# Altium PCB Main_Block.PcbDoc (part 1 of 3)
Units mil, origin at the board's own origin, x right, y up, seen from the top; angles counter-clockwise.
Board outline 1101.34 x 1573.78 mil, 8 copper layers (Top Layer - Signal, L2 - GND, L3-Signal, Layer 3 - Signal, L5 PWR, L6-Signal, L7-GND, Bottom Layer - Signal), stack 62.48 mil thick; 156 components, 137 nets, 799 pads, 431 vias.
Unrouted connection lines stored in the file: 382.
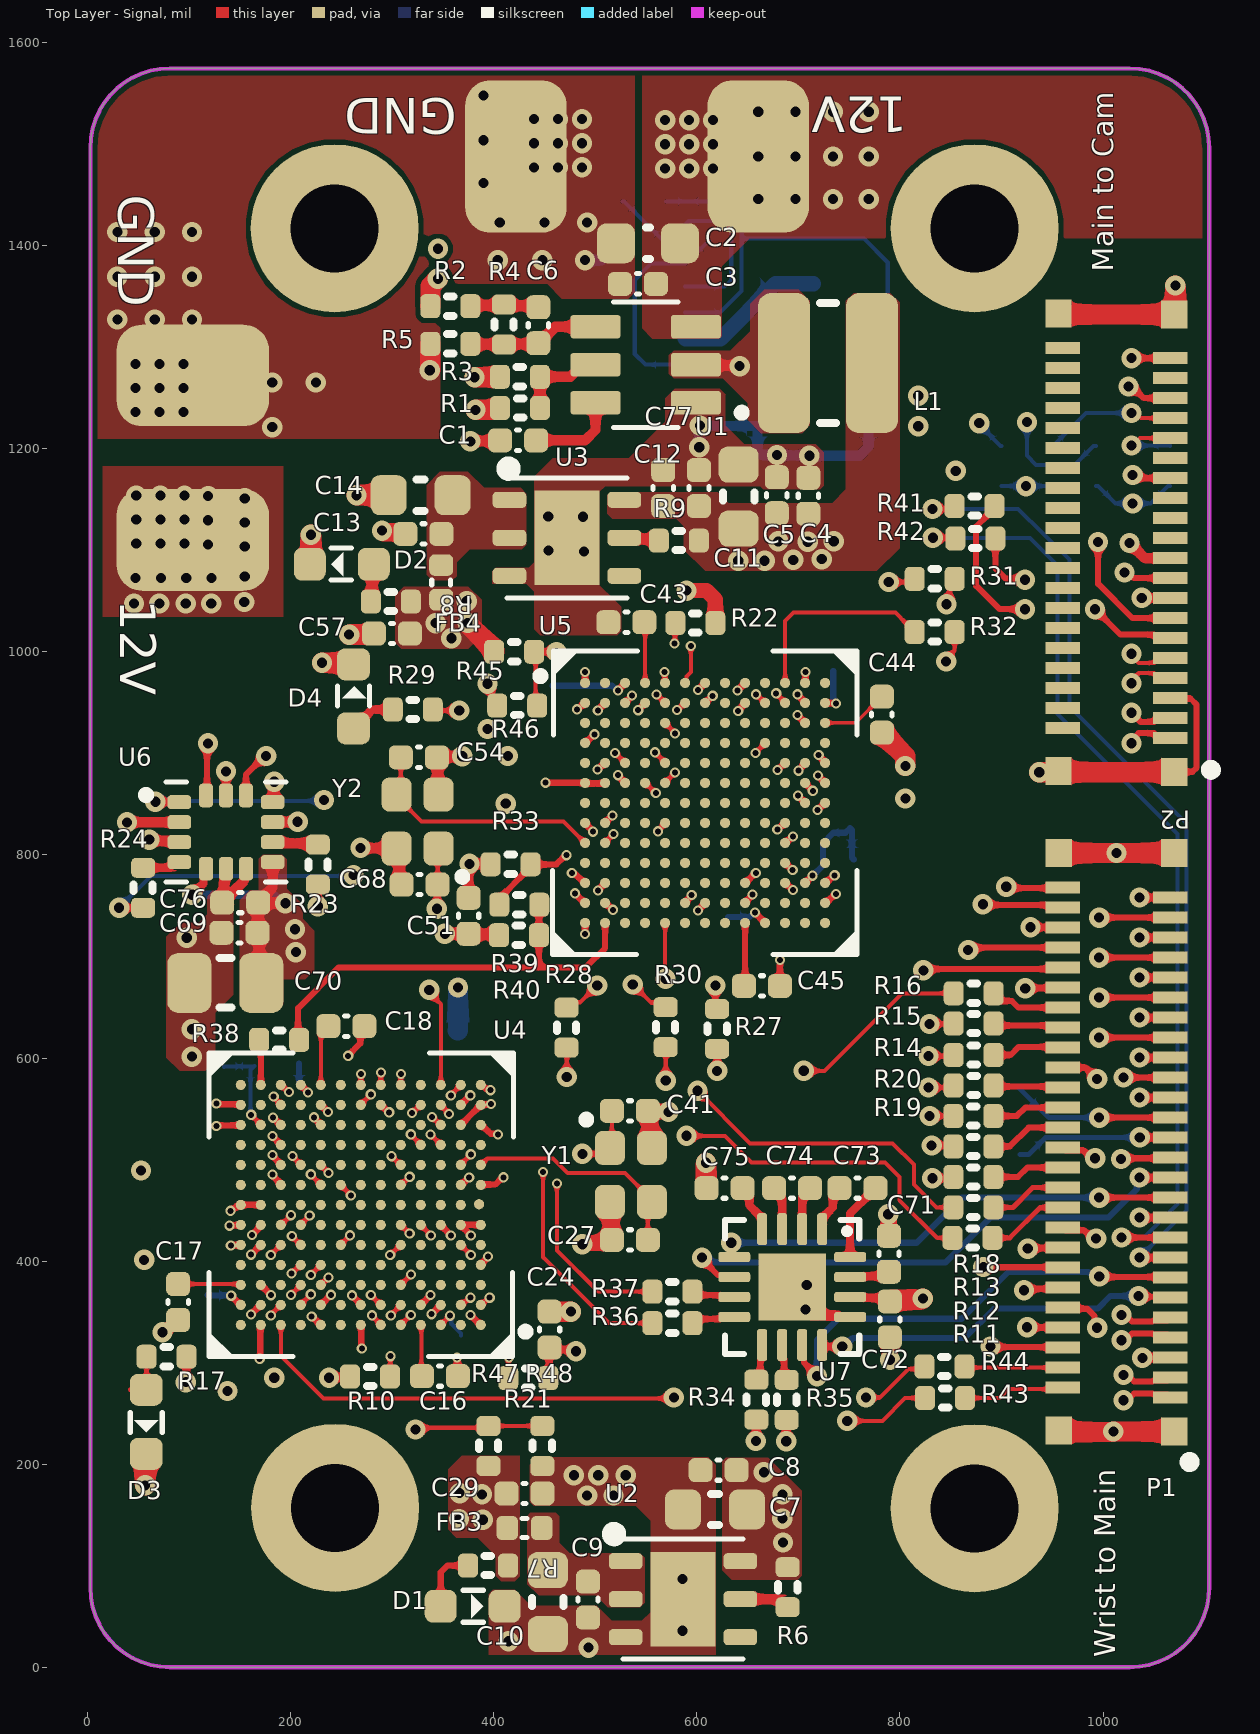
[diagram p0: Top Layer - Signal view]
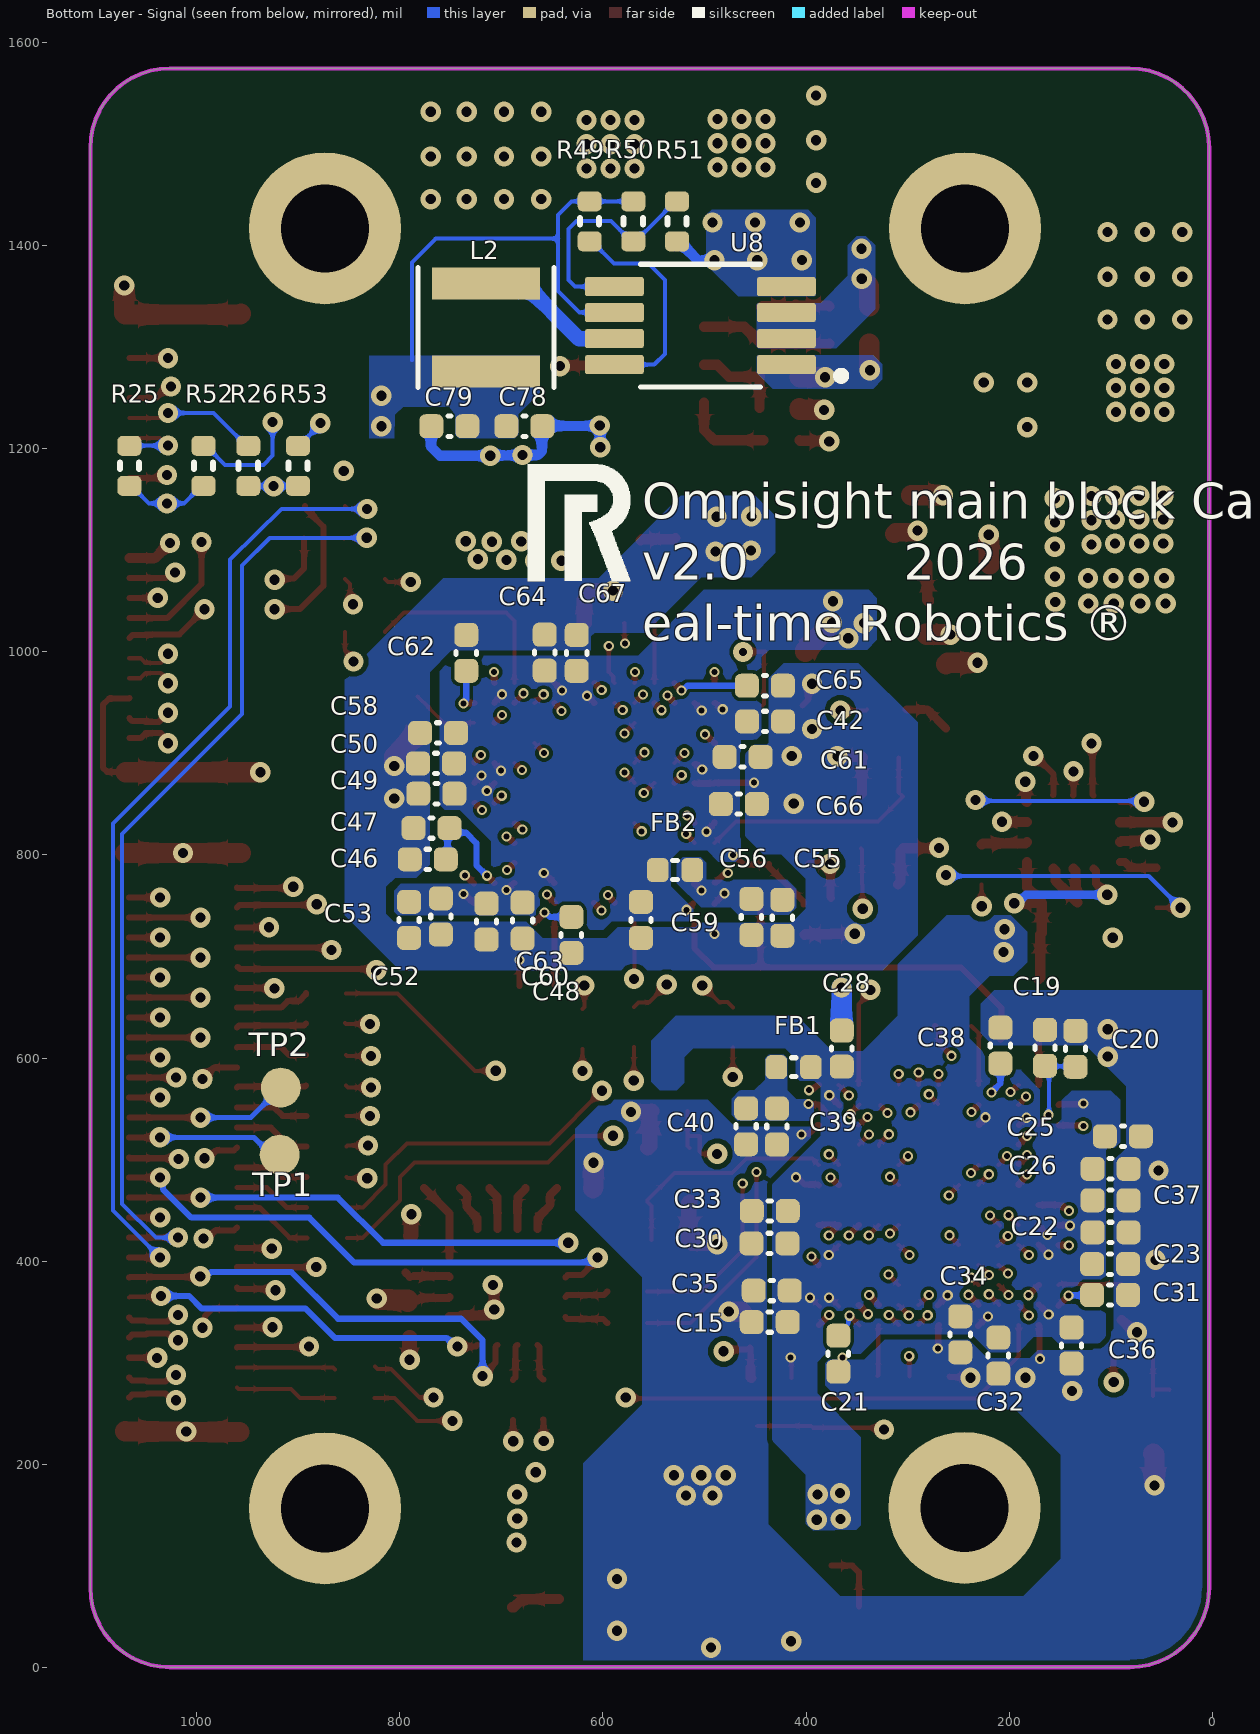
[diagram p1: Bottom Layer - Signal view, seen from below]
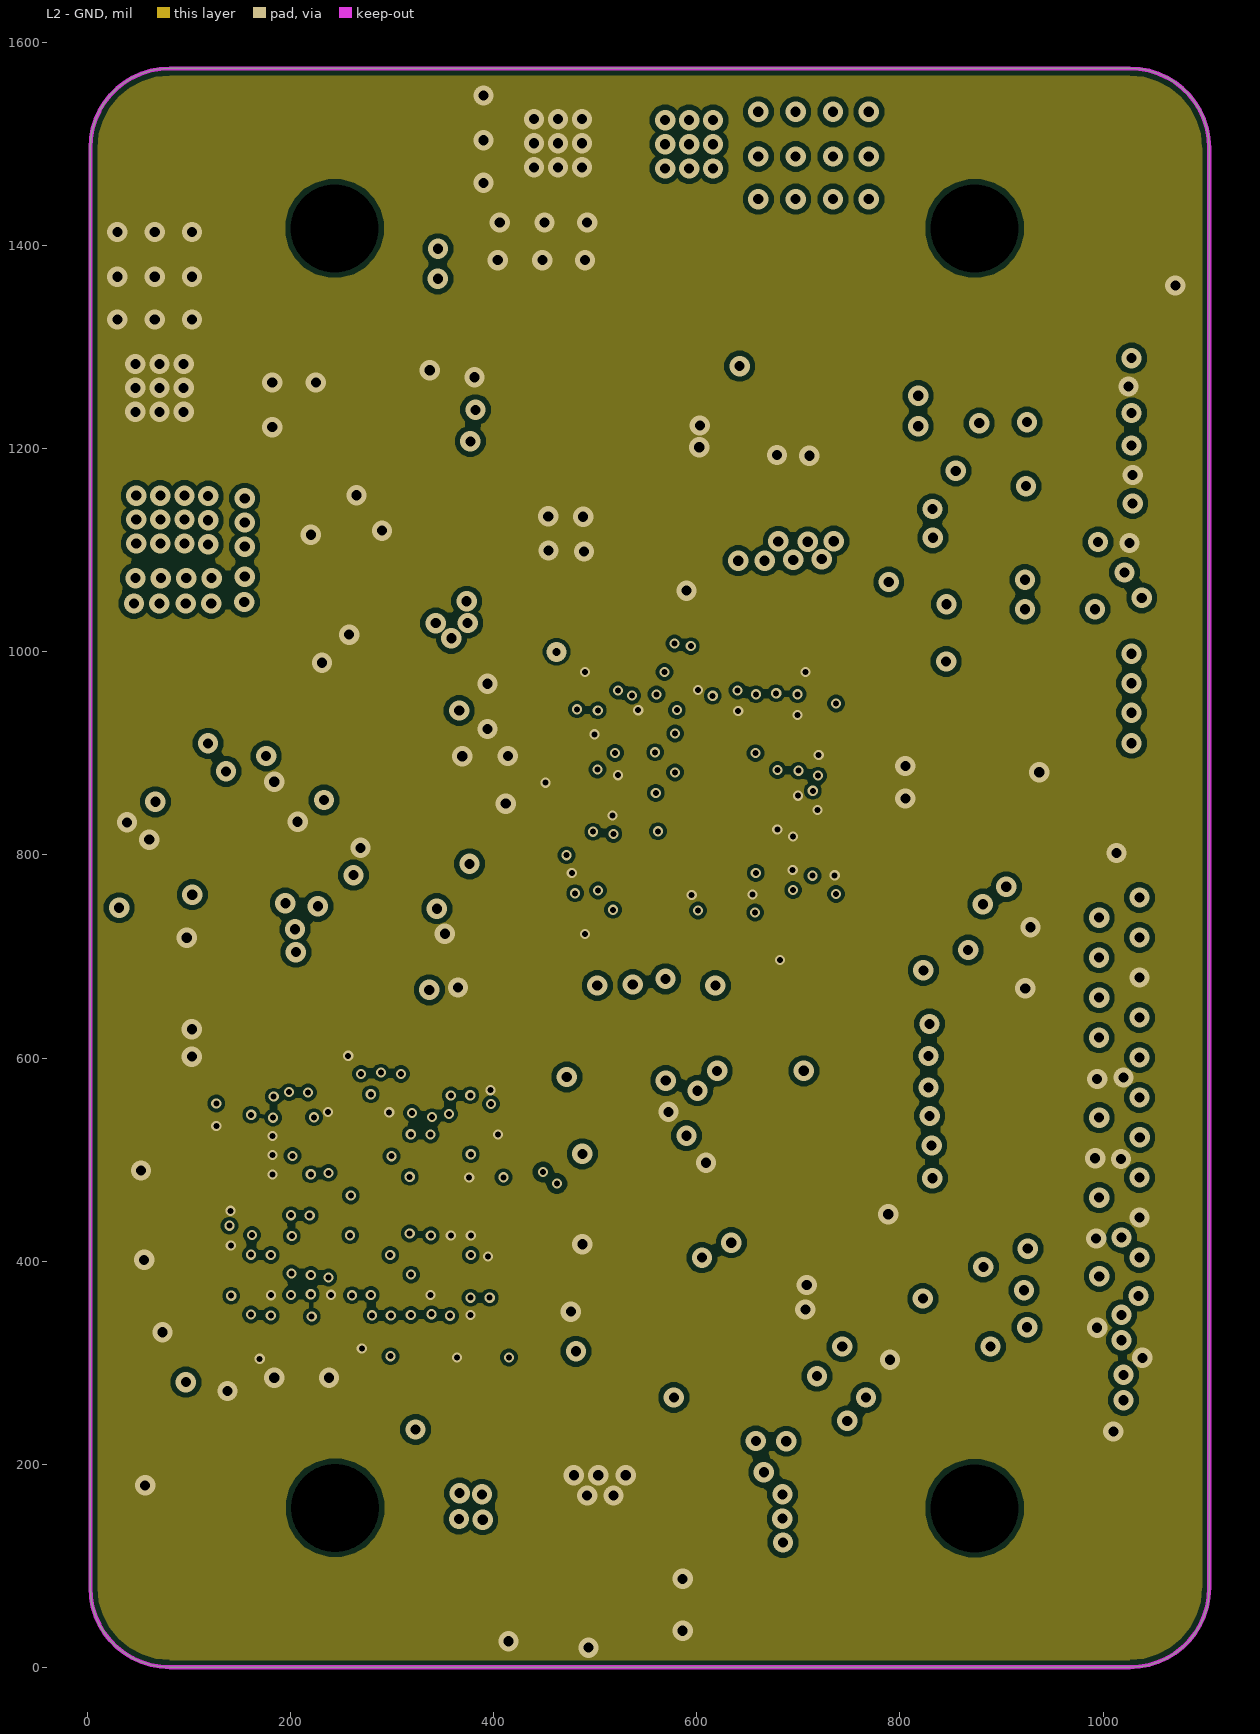
[diagram p2: L2 - GND]
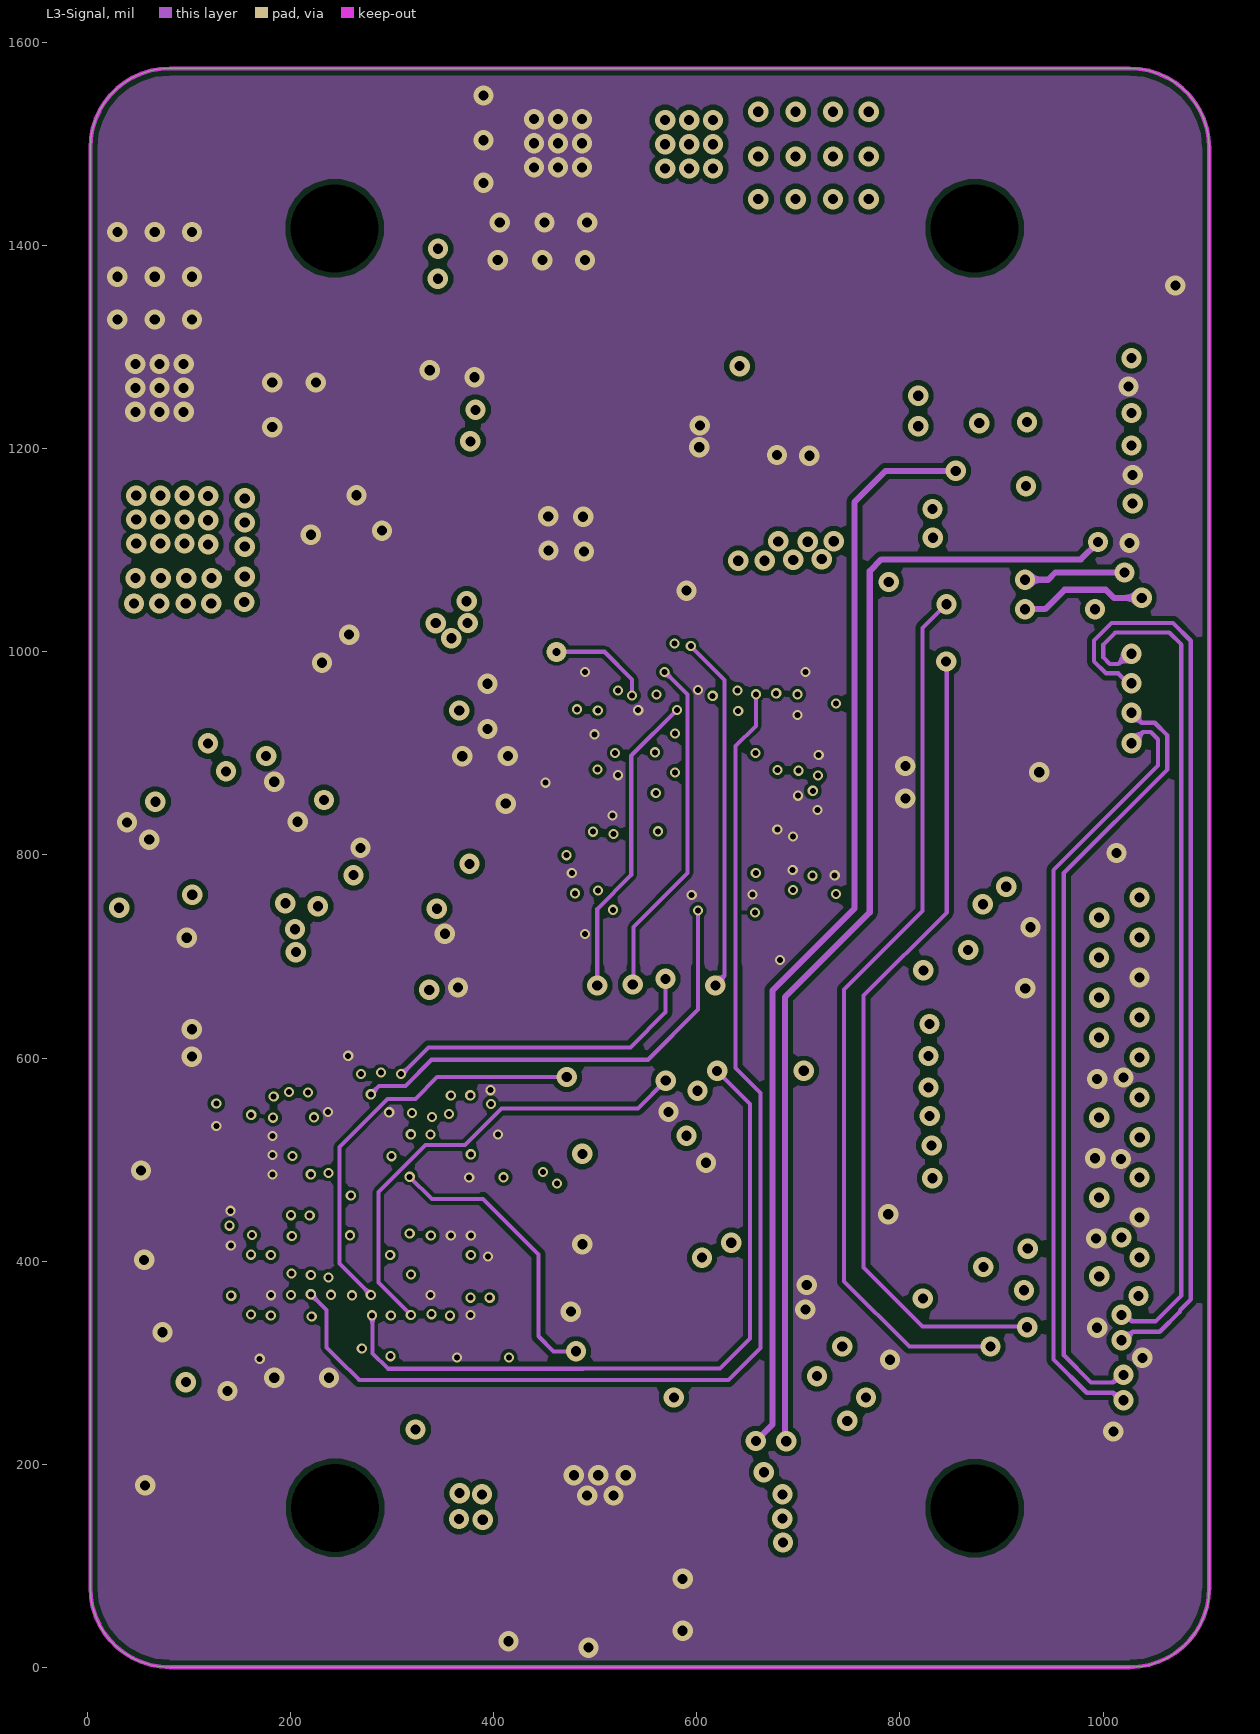
[diagram p3: L3-Signal]
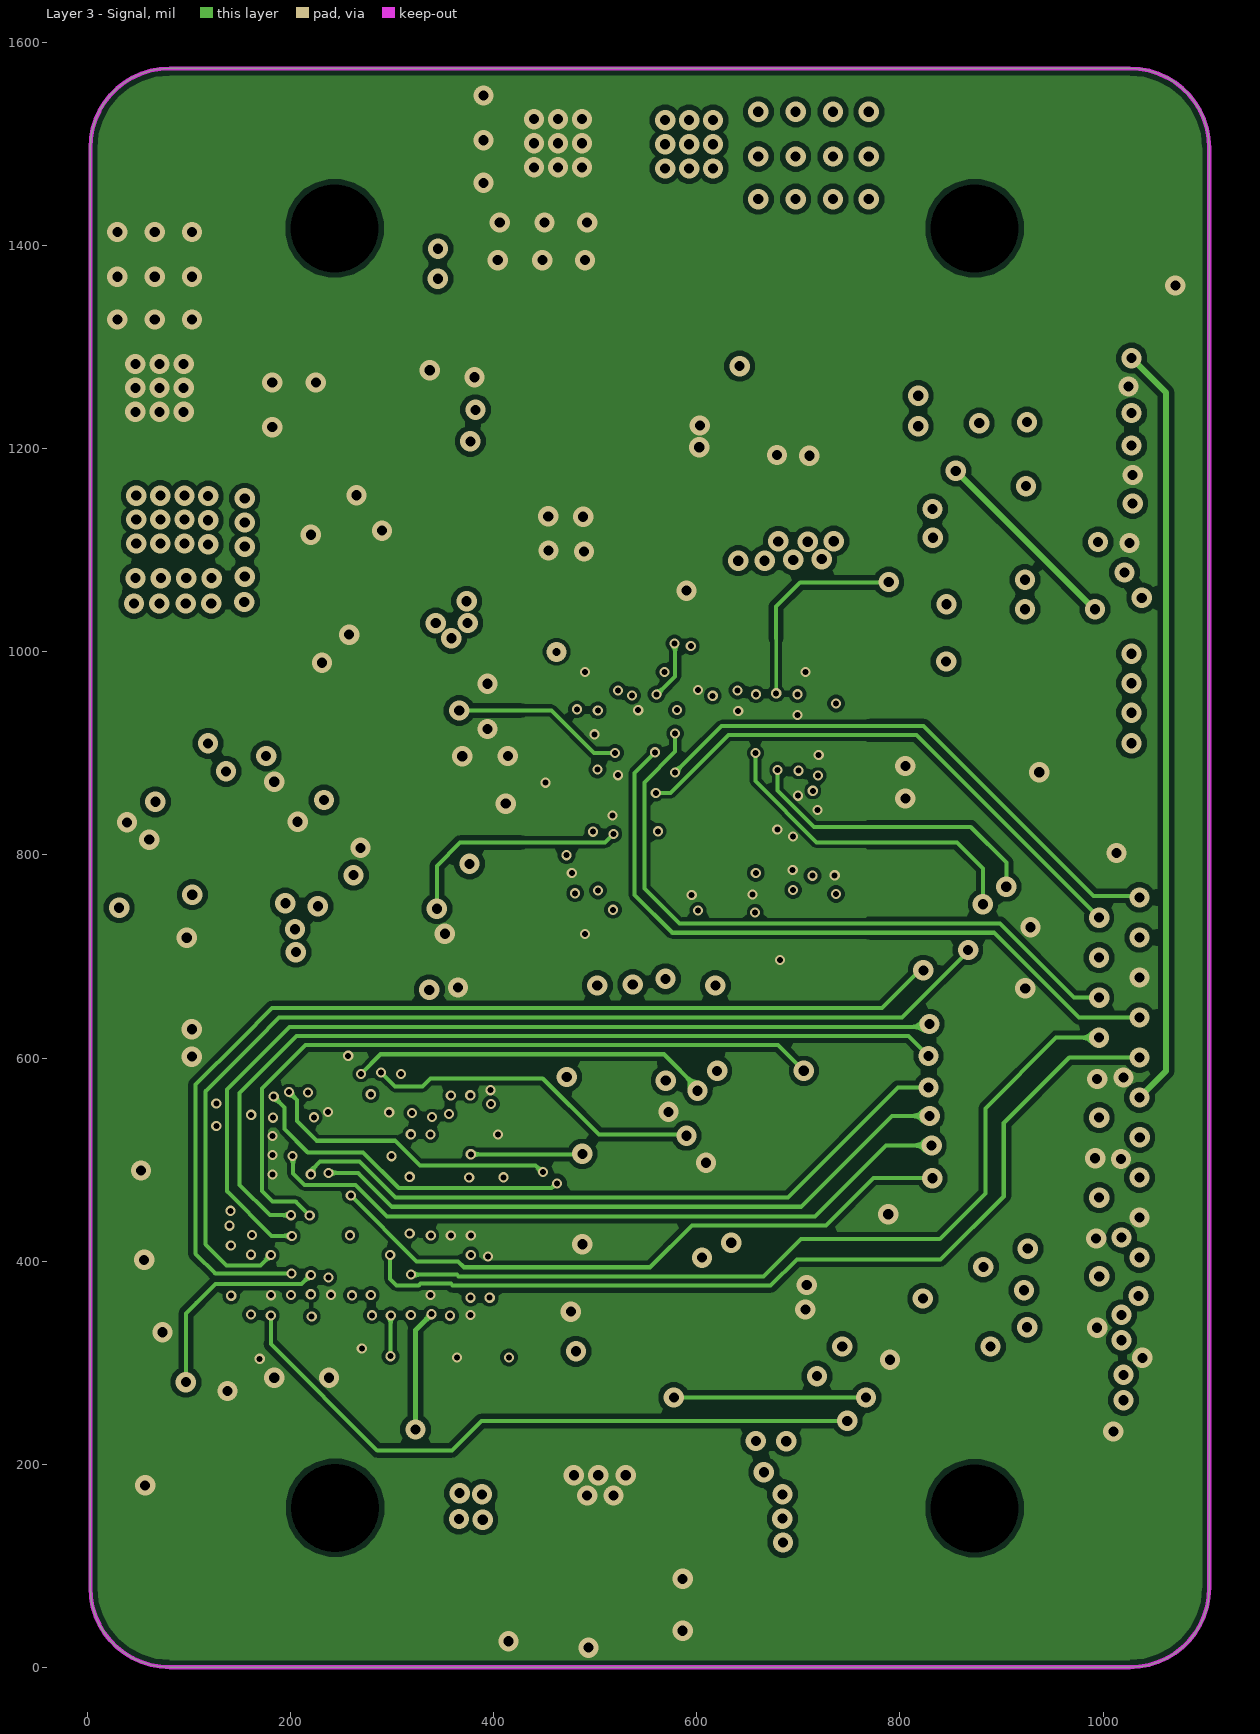
[diagram p4: Layer 3 - Signal]
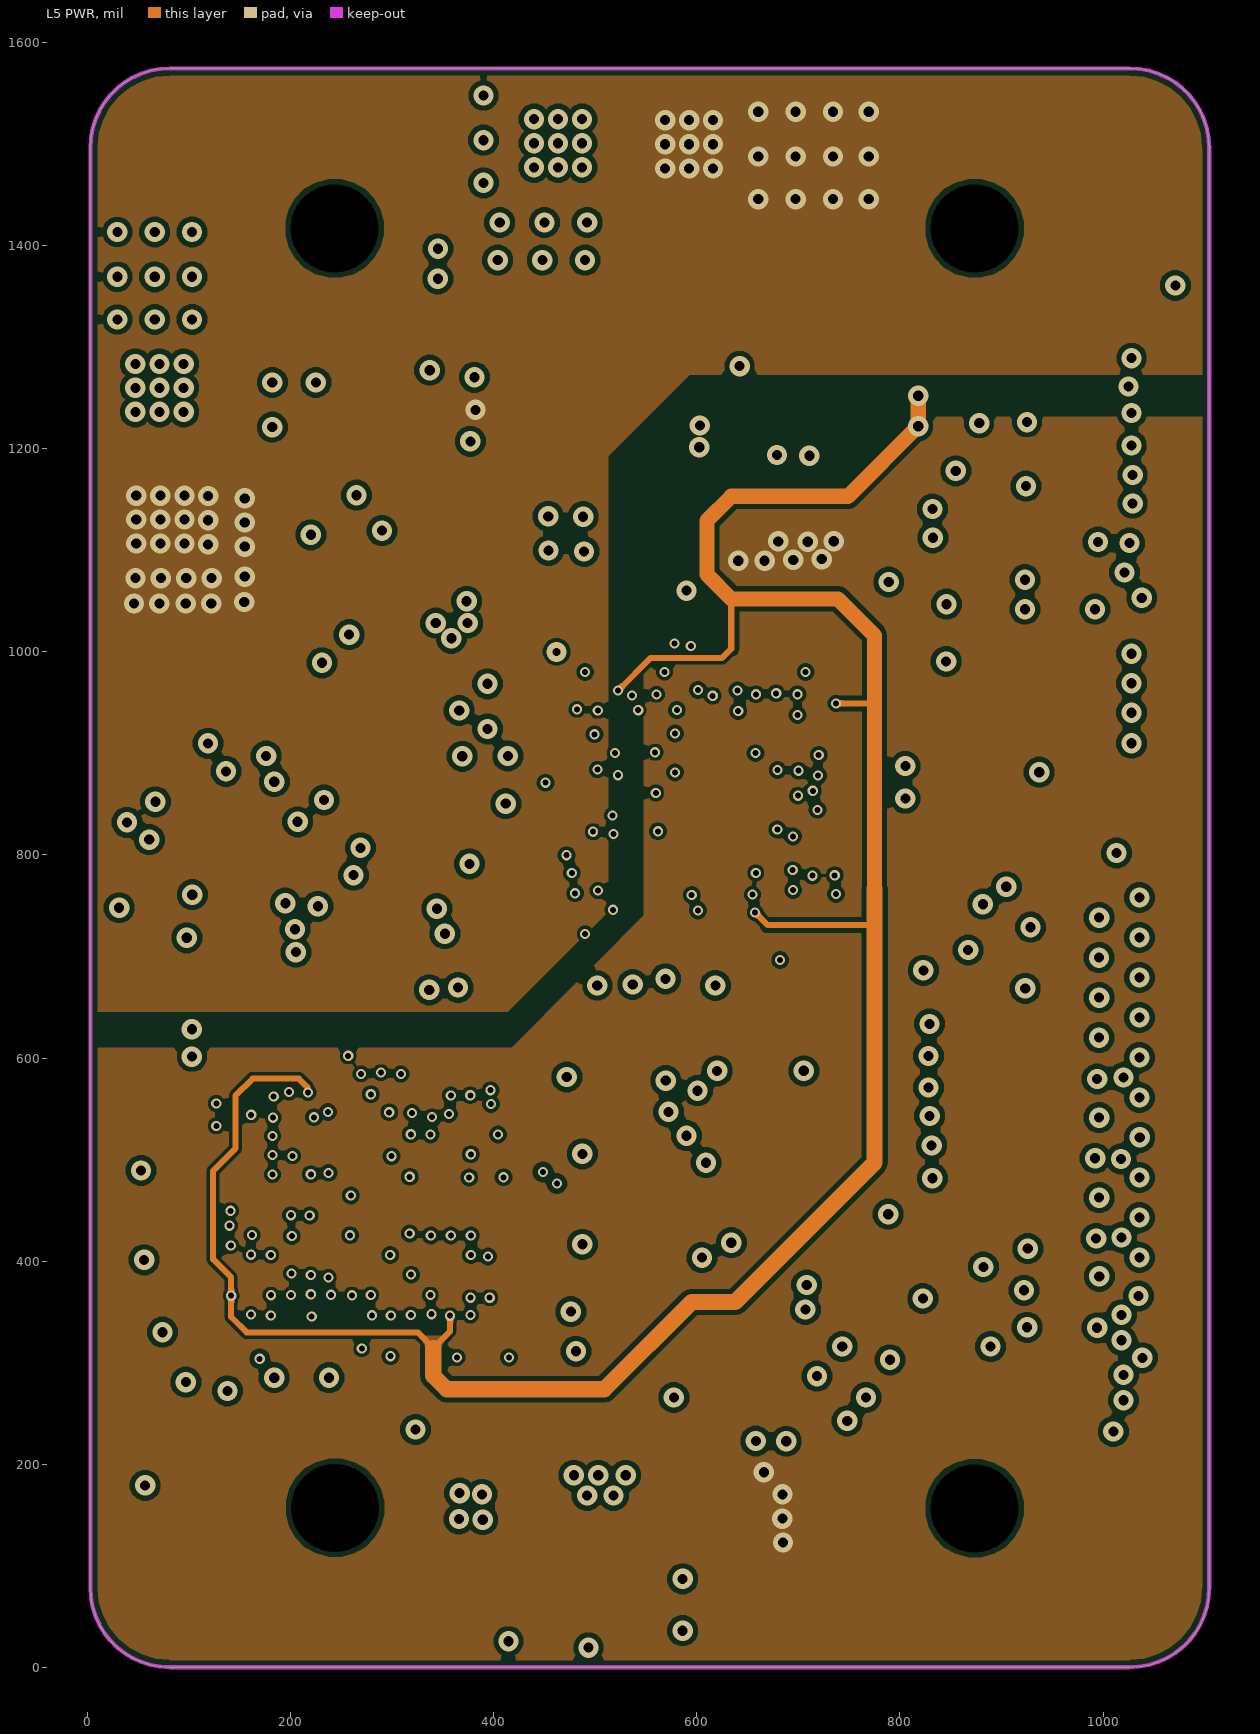
[diagram p5: L5 PWR]
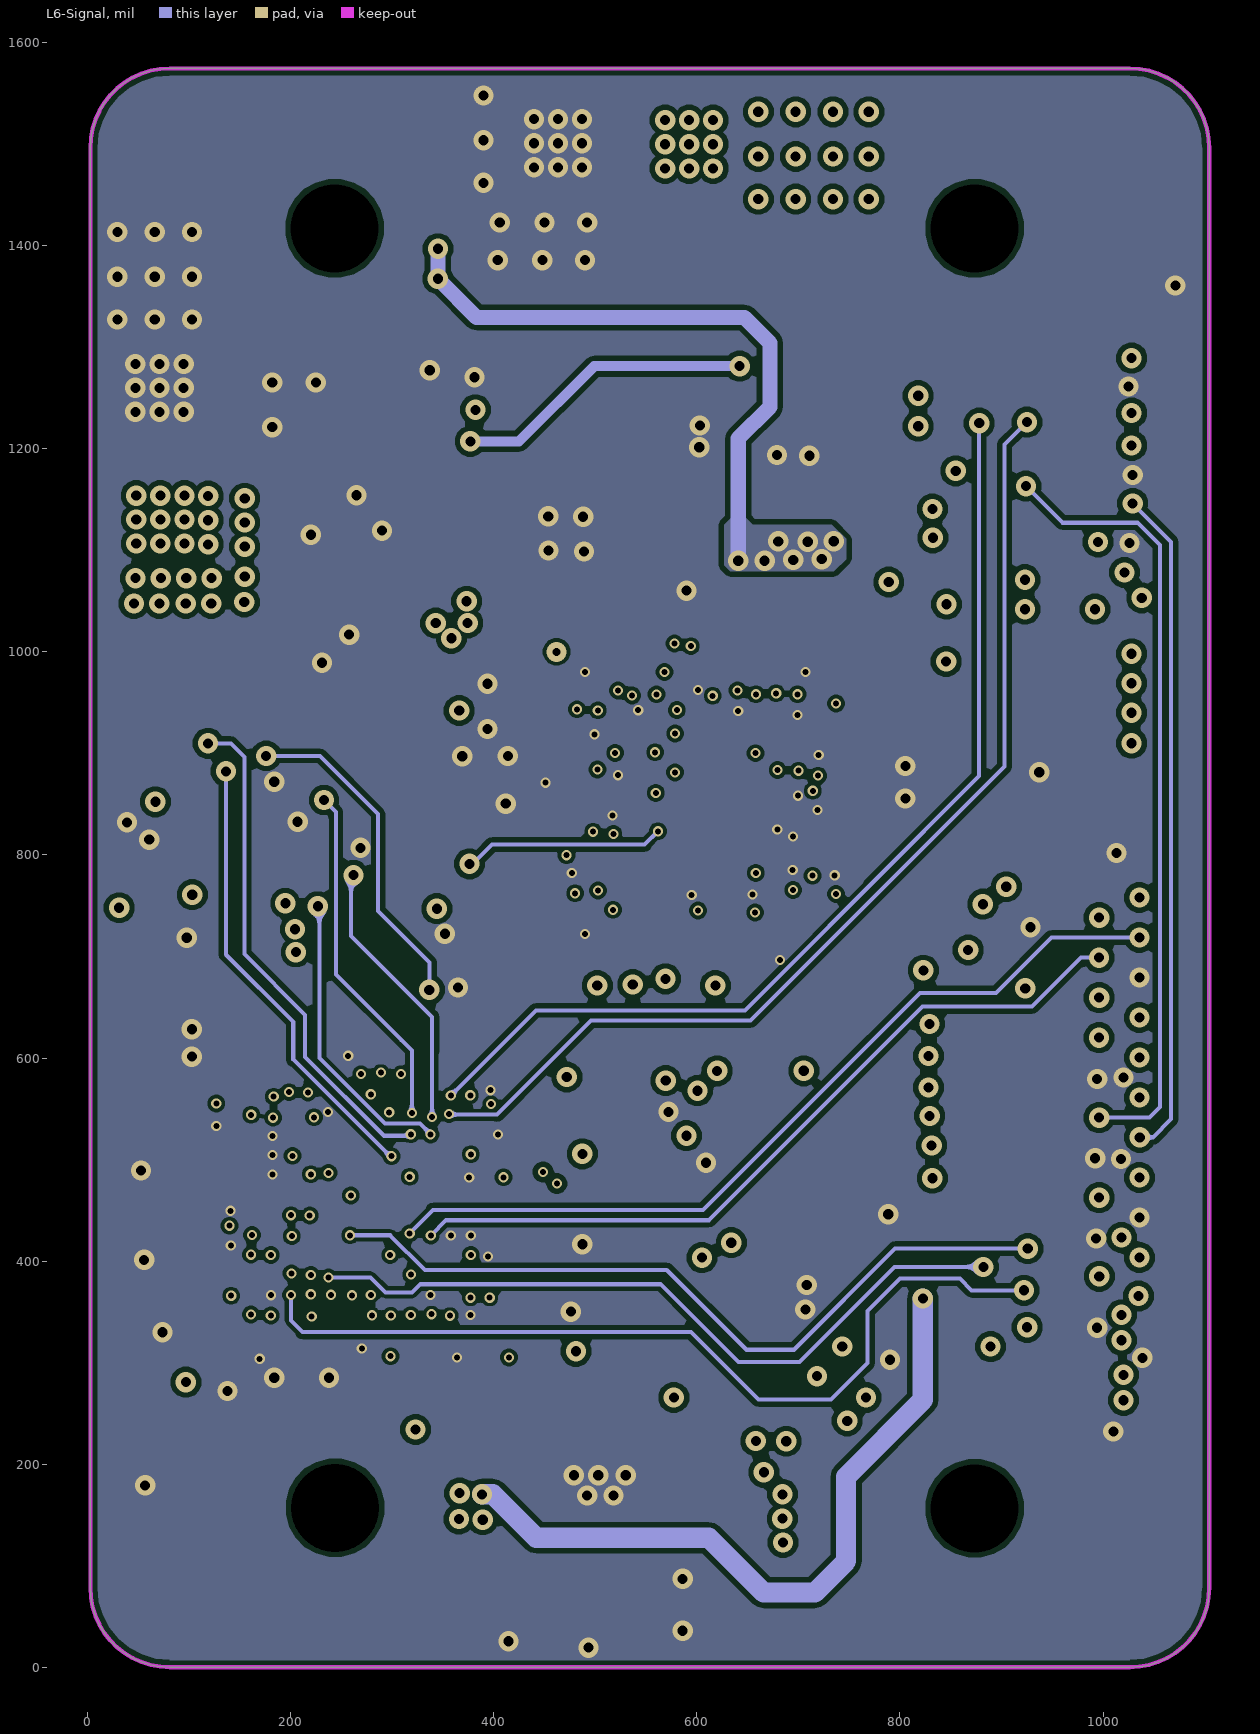
[diagram p6: L6-Signal]
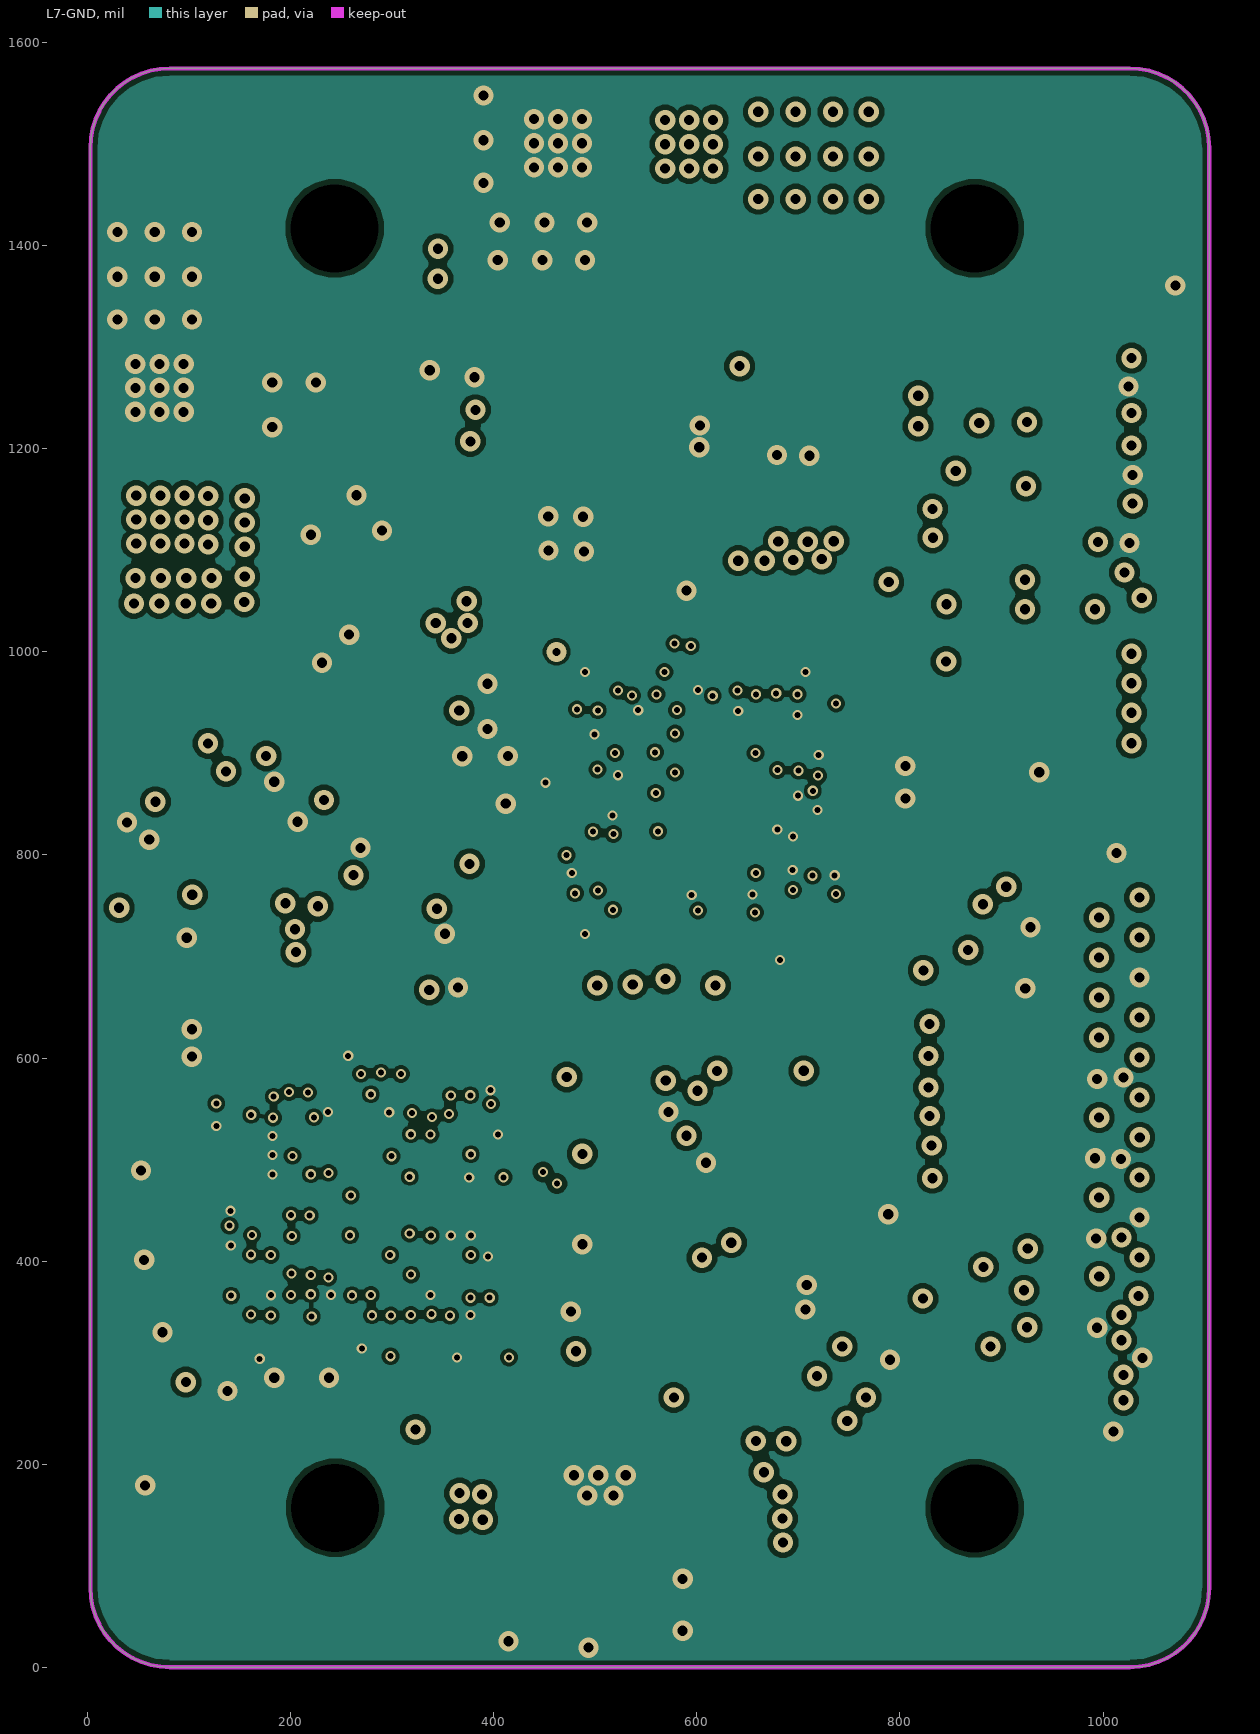
[diagram p7: L7-GND]
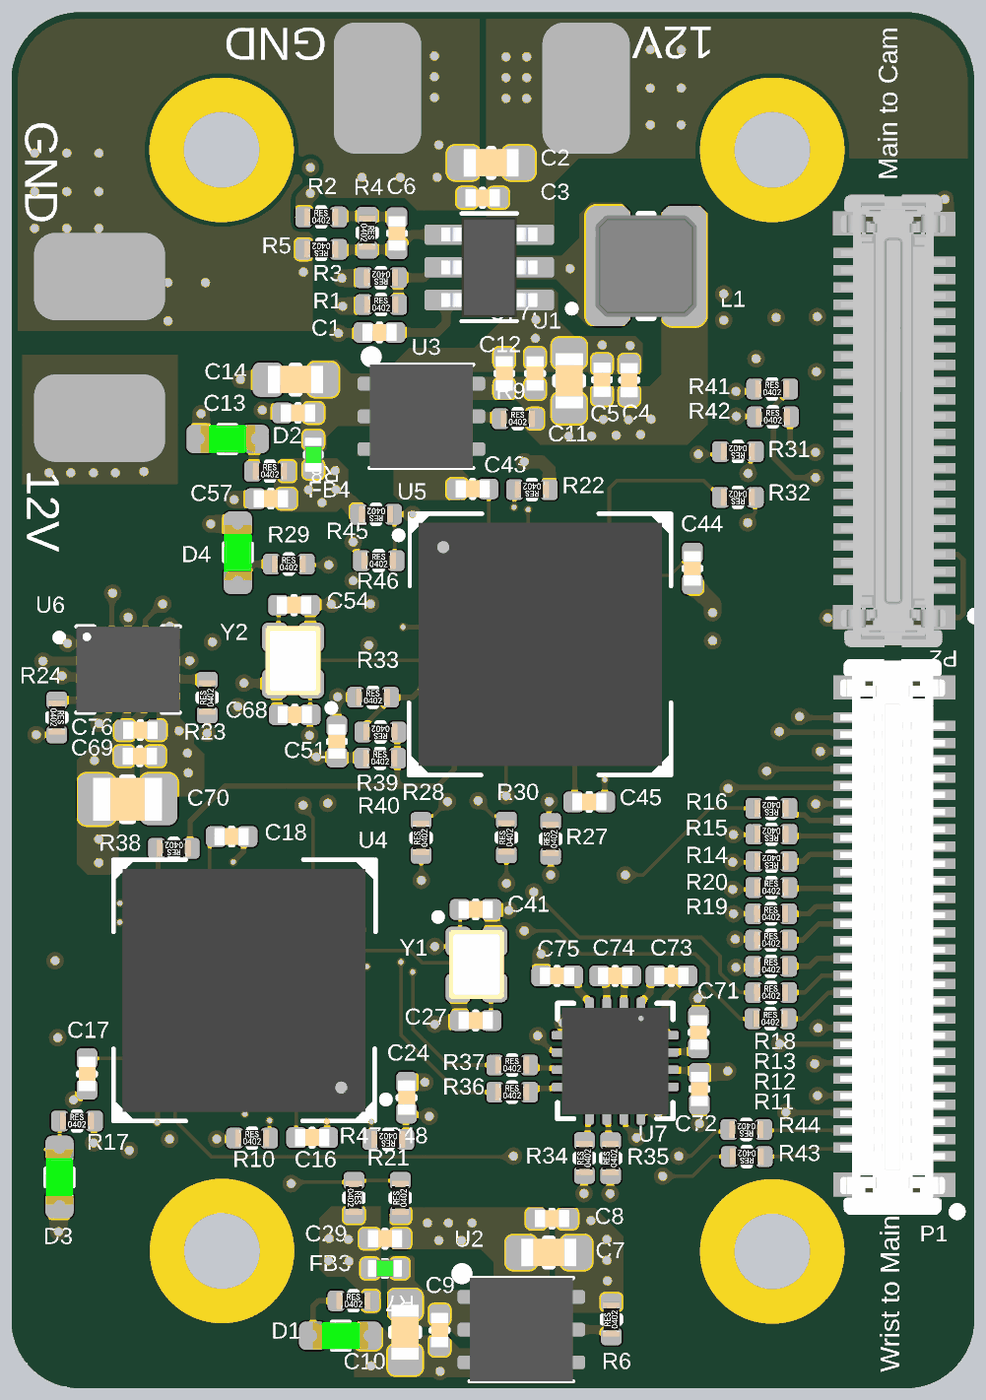
[diagram p10: 3D render of the assembled board from above, using the file's embedded part models]
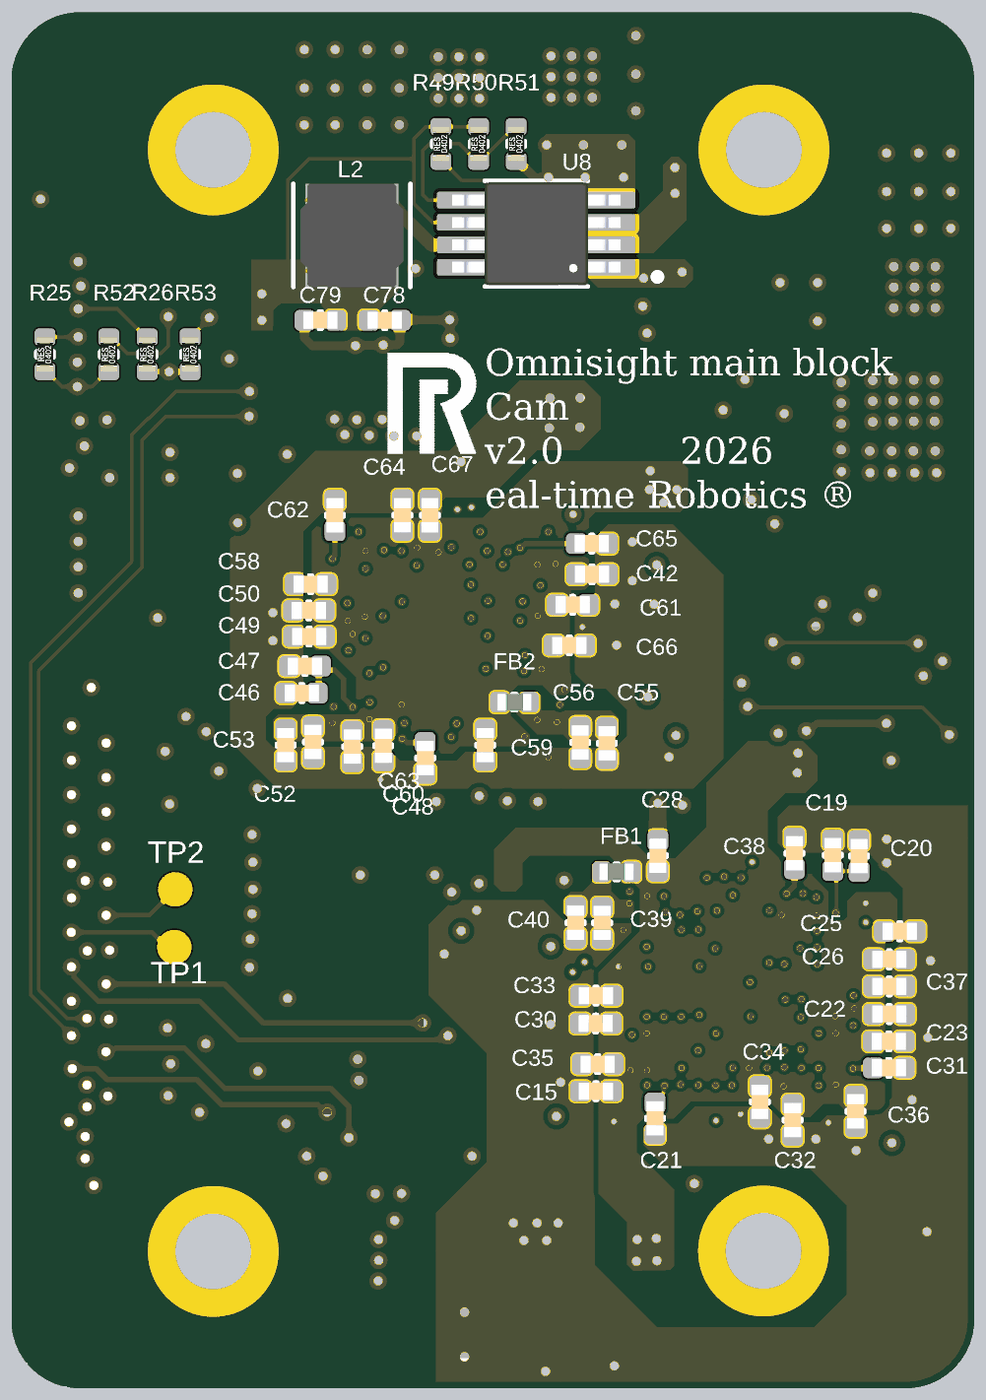
[diagram p11: 3D render of the assembled board from below, using the file's embedded part models]

## Layer stack, top to bottom
Top Solder: solder mask 0.4, Solder Resist, Dk 3.5
Top Layer - Signal: signal copper 0.689
Dielectric 6: prepreg 5.1181, PP-006, Dk 4.1
L2 - GND: signal copper 1.378
Dielectric 4: prepreg 9.0551, PP-006, Dk 4.1
L3-Signal: signal copper 1.378
Dielectric 2: prepreg 7.7165, PP-006, Dk 4.1
Layer 3 - Signal: signal copper 1.378
Dielectric 1: dielectric 9.0551, FR-4, Dk 4.8
L5 PWR: signal copper 1.378
Dielectric 3: prepreg 7.7165, PP-006, Dk 4.1
L6-Signal: signal copper 1.378
Dielectric 5: prepreg 9.0551, PP-006, Dk 4.1
L7-GND: signal copper 1.378
Dielectric 7: prepreg 5.1181, PP-006, Dk 4.1
Bottom Layer - Signal: signal copper 0.689
Bottom Solder: solder mask 0.4, Solder Resist, Dk 3.5

## Board outline
81.35,0.48 cw(c81.35,78.72) 3.12,78.72 3.12,1496.03 cw(c81.35,1496.03) 81.35,1574.26 1026.23,1574.26 cw(c1026.23,1496.03) 1104.46,1496.03 1104.46,78.72 cw(c1026.23,78.72) 1026.23,0.48

## Design rules (kind name [scope] priority, off if disabled: settings)
Clearance Clearance_BGA_MCU2 [WithinRoom('Room_BGA_MCU2')] p1: gap=3.5 ignorepadtopadclearanceinfootprint=FALSE
Clearance Clearance_BGA_MCU1 [WithinRoom('Room_BGA_MCU1')] p2: gap=3.5 ignorepadtopadclearanceinfootprint=FALSE
Clearance Clearance_Keep [Keepout] p3: gap=5 ignorepadtopadclearanceinfootprint=FALSE
Clearance Clearance_1 [All] p4: gap=5 ignorepadtopadclearanceinfootprint=FALSE
DiffPairsRouting [InDifferentialPairClass('ETH')] p1: maxlimit=7 minlimit=6 mostfreqgap=6 toplayer_maxgap=6 toplayer_minwidth=6 toplayer_maxwidth=6 toplayer_prefwidth=6 midlayer1_maxgap=6 midlayer1_minwidth=4.2 midlayer1_maxwidth=4.2 midlayer1_prefwidth=4.2 midlayer2_maxgap=6 midlayer2_minwidth=4.5 midlayer2_maxwidth=4.5 midlayer2_prefwidth=4.5 midlayer3_maxgap=6 midlayer3_minwidth=4.5 midlayer3_maxwidth=4.5 midlayer3_prefwidth=4.5 midlayer4_maxgap=6 midlayer4_minwidth=4.2 midlayer4_maxwidth=4.2 midlayer4_prefwidth=4.2 midlayer5_mingap=7 midlayer5_prefgap=7 midlayer5_minwidth=4.2 midlayer5_maxwidth=4.2 midlayer5_prefwidth=4.2 midlayer6_mingap=7 midlayer6_prefgap=7 midlayer6_minwidth=4.2 midlayer6_maxwidth=4.2 midlayer6_prefwidth=4.2 bottomlayer_maxgap=6 bottomlayer_minwidth=6 bottomlayer_maxwidth=6 bottomlayer_prefwidth=6 impedanceprofiledriven=TRUE impedanceprofileid={E8D86295-9702-44AE-8752-73AF3E4B6864} impedanceprofilevalue=100.000000 maxuncoupledlength=500
HoleToHoleClearance [All] p1: gap=1 allowstackedmicrovias=TRUE
MinimumSolderMaskSliver [All] p1: minsoldermaskwidth=1
PlaneConnect [All] p1: planeconnectstyle=Direct reliefexpansion=20 reliefentries=4 reliefconductorwidth=10 reliefairgap=10
PolygonConnect [All] p1: connectstyle=Direct reliefconductorwidth=10 reliefentries=4 polygonreliefangle="90 Angle" airgapwidth=10
RoomDefinition Room_BGA_MCU1 [InComponent('No Component')] p1: confinementstyle=ConfineIn formatcopy=TRUE lockcomponents=TRUE outline 422.96,607 116,607 116,305 424,305 424,606
RoomDefinition Room_BGA_MCU2 [InComponent('No Component')] p2: confinementstyle=ConfineIn formatcopy=TRUE lockcomponents=TRUE outline 427.4,689.26 427.4,1013.26 770.28,1013.26 770.28,689.26
RoutingVias RoutingVias_BGA_MCU2 [WithinRoom('Room_BGA_MCU2')] p1: holewidth=5 width=10 viastyle="Through Hole" minholewidth=5 minwidth=10 maxholewidth=7.87 maxwidth=19.68
RoutingVias RoutingVias_BGA_MCU1 [WithinRoom('Room_BGA_MCU1')] p2: holewidth=5 width=10 viastyle="Through Hole" minholewidth=5 minwidth=10 maxholewidth=7.87 maxwidth=19.68
RoutingVias [All] p3: holewidth=10 width=20 viastyle="Through Hole" minholewidth=10 minwidth=20 maxholewidth=10 maxwidth=20
SilkToSilkClearance [All] p1: silktosilkclearance=0
SilkToSolderMaskClearance [IsPad] p1: minsilkscreentomaskgap=1 clearancetoexposedcopper=TRUE
SolderMaskExpansion [IsVia] p1: expansion=4 istentingtop=TRUE
Width Width_BGA_MCU2 [WithinRoom('Room_BGA_MCU2')] p1: maxlimit=6 minlimit=3.5 preferedwidth=4
Width Width_BGA_MCU1 [WithinRoom('Room_BGA_MCU1')] p2: maxlimit=6 minlimit=3.5 preferedwidth=4
Width [All] p3: maxlimit=20 minlimit=4 preferedwidth=8
24 further rules are at their usual default settings.

## Classes and differential pairs
component class RS232: C71 C72 C73 C74 C75 R34 R35 R36 R37 U7
component class PWR: C1 C2 C3 C4 C5 C6 C7 C8 C9 C10 C11 C12 C13 C14 C77 C78 C79 D1 D2 FB3 FB4 J1 J2 L1 L2 R1 R2 R3 R4 R5 R6 R7 R8 R9 R49 R50 R51 U1 U2 U3 U8
component class MCU2: C42 C43 C44 C45 C46 C47 C48 C49 C50 C51 C52 C53 C54 C55 C56 C57 C58 C59 C60 C61 C62 C63 C64 C65 C66 C67 C68 D4 FB2 R22 R29 R31 R32 R33 R39 R40 R45 R46 U5 Y2
component class MCU1: C15 C16 C17 C18 C19 C20 C21 C22 C23 C24 C25 C26 C27 C28 C29 C30 C31 C32 C33 C34 C35 C36 C37 C38 C39 C40 C41 D3 FB1 R10 R11 R12 R13 R14 R15 R16 R17 R18 R19 R20 R21 R27 R28 R30 R38 R43 R44 R47 R48 R52 R53 TP1 TP2 U4 Y1
component class IMU: C69 C70 C76 R23 R24 U6
component class Connector: P1 P2 R25 R26 R41 R42
differential pair ETHE_TX: +ETHE_TX_P -ETHE_TX_N
differential pair ETHE_RX: +ETHE_RX_P -ETHE_RX_N

## Components (designator, comment, footprint, x,y, rotation, side; value= is the part's Value field where it differs from the comment)
C1 "CC0402KRX5R9BB104" CAP0402 424.19,1208.11 r0 top
C2 "GRM188R6YA106MA73D" CAP0603-M 552,1402 r180 top
C3 "CC0402KRX5R9BB104" CAP0402 542.19,1362.11 r0 top
C4 "GRM158R61A226ME15D" CAP0402 709.94,1153.53 r270 top
C5 "GRM158R61A226ME15D" CAP0402 678.76,1154.07 r270 top
C6 "75pF" CAP0402 444.19,1321.39 r270 top
C7 "GRM188R6YA106MA73D" CAP0603 617.95,155.76 r180 top
C8 "CC0402KRX5R9BB104" CAP0402 621.5,194.55 r0 top
C9 "CC0402KRX5R9BB104" CAP0402 493,67 r90 top
C10 "GRM188R6YA106MA73D" CAP0603 453.5,64.55 r270 top
C11 "GRM188R6YA106MA73D" CAP0603 641.24,1152.71 r90 top
C12 "CC0402KRX5R9BB104" CAP0402 602.19,1161.11 r270 top
C13 "CC0402KRX5R9BB104" CAP0402 331,1116 r0 top
C14 "GRM188R6YA106MA73D" CAP0603 328.19,1154.11 r180 top
C15 "CAP0402 0.1uF 50V" CAP0402 435.76,340.21 r180 bottom value=0.1uF
C16 "CAP0402 2.2uF 16V" CAP0402 347.19,287.11 r180 top value=2.2uF
C17 "CAP0402 2.2uF 16V" CAP0402 89.6,359.98 r90 top value=2.2uF
C18 "CAP0402 2.2uF 16V" CAP0402 255.09,631.48 r180 top value=2.2uF
C19 "CAP0402 2.2uF 16V" CAP0402 164.76,610.21 r90 bottom value=2.2uF
C20 "CAP0402 0.1uF 50V" CAP0402 134.76,609.21 r270 bottom value=0.1uF
C21 "CAP0402 4.7uF 25V" CAP0402 368.19,309.11 r90 bottom value=4.7uF
C22 "CAP0402 1uF 50V" CAP0402 100.18,428.45 r0 bottom value=1uF
C23 "CAP0402 0.1uF 50V" CAP0402 100.76,397.21 r0 bottom value=0.1uF
C24 "CAP0402 0.1uF 50V" CAP0402 455.19,332.83 r90 top value=0.1uF
C25 "CAP0402 0.1uF 50V" CAP0402 88.19,523.11 r0 bottom value=0.1uF
C26 "CAP0402 1uF 50V" CAP0402 100.18,491.08 r0 bottom value=1uF
C27 "CAP0402 12pF 50V" CAP0402 534.19,421.11 r0 top value=12pF
C28 "CAP0402 0.1uF 50V" CAP0402 364.84,609.45 r270 bottom value=0.1uF
C29 "CAP0402 4.7uF 25V" CAP0402 430.5,171.55 r180 top value=4.7uF
C30 "CAP0402 0.1uF 50V" CAP0402 436.05,417.68 r180 bottom value=0.1uF
C31 "CAP0402 0.1uF 50V" CAP0402 100.68,366.93 r0 bottom value=0.1uF
C32 "CAP0402 0.1uF 50V" CAP0402 210.76,307.21 r90 bottom value=0.1uF
C33 "CAP0402 0.1uF 50V" CAP0402 435.71,449.53 r180 bottom value=0.1uF
C34 "CAP0402 0.1uF 50V" CAP0402 248.19,328.11 r90 bottom value=0.1uF
C35 "CAP0402 0.1uF 50V" CAP0402 433.76,371.21 r180 bottom value=0.1uF
C36 "CAP0402 0.1uF 50V" CAP0402 138.76,317.21 r90 bottom value=0.1uF
C37 "CAP0402 0.1uF 50V" CAP0402 100.18,460.11 r0 bottom value=0.1uF
C38 "CAP0402 0.1uF 50V" CAP0402 208.67,612.33 r270 bottom value=0.1uF
C39 "CAP0402 1uF 50V" CAP0402 428.68,532.72 r90 bottom value=1uF
C40 "CAP0402 0.1uF 50V" CAP0402 459.04,532.94 r90 bottom value=0.1uF
C41 "CAP0402 12pF 50V" CAP0402 534.19,548.11 r180 top value=12pF
C42 "CAP0402 0.1uF 50V" CAP0402 440.28,931.43 r0 bottom value=0.1uF
C43 "CAP0402 2.2uF 16V" CAP0402 530.77,1029.05 r180 top value=2.2uF
C44 "CAP0402 2.2uF 16V" CAP0402 782.19,938.11 r270 top value=2.2uF
C45 "CAP0402 2.2uF 16V" CAP0402 664.19,671.11 r0 top value=2.2uF
C46 "CAP0402 2.2uF 16V" CAP0402 772.29,795.6 r0 bottom value=2.2uF
C47 "CAP0402 0.1uF 50V" CAP0402 768.61,826.45 r180 bottom value=0.1uF
C48 "CAP0402 4.7uF 25V" CAP0402 631,721.28 r90 bottom value=4.7uF
C49 "CAP0402 1uF 50V" CAP0402 763.86,860.28 r180 bottom value=1uF
C50 "CAP0402 0.1uF 50V" CAP0402 764.18,890.09 r180 bottom value=0.1uF
C51 "CAP0402 0.1uF 50V" CAP0402 375.47,740.13 r270 top value=0.1uF
C52 "CAP0402 0.1uF 50V" CAP0402 759.4,739.57 r90 bottom value=0.1uF
C53 "CAP0402 1uF 50V" CAP0402 790.69,736.08 r90 bottom value=1uF
C54 "CAP0402 12pF 50V" CAP0402 326.47,896.11 r180 top value=12pF
C55 "CAP0402 1uF 50V" CAP0402 423.23,738.18 r90 bottom value=1uF
C56 "CAP0402 0.1uF 50V" CAP0402 453.75,739 r90 bottom value=0.1uF
C57 "CAP0402 4.7uF 25V" CAP0402 299.96,1017.97 r0 top value=4.7uF
C58 "CAP0402 0.1uF 50V" CAP0402 762.19,920.11 r180 bottom value=0.1uF
C59 "CAP0402 0.1uF 50V" CAP0402 562.42,736.1 r90 bottom value=0.1uF
C60 "CAP0402 0.1uF 50V" CAP0402 679.02,735.34 r90 bottom value=0.1uF
C61 "CAP0402 0.1uF 50V" CAP0402 462.4,896.57 r0 bottom value=0.1uF
C62 "CAP0402 0.1uF 50V" CAP0402 734.4,998.89 r270 bottom value=0.1uF
C63 "CAP0402 0.1uF 50V" CAP0402 714.52,734.37 r90 bottom value=0.1uF
C64 "CAP0402 0.1uF 50V" CAP0402 657.19,999.11 r270 bottom value=0.1uF
C65 "CAP0402 0.1uF 50V" CAP0402 440.5,966.55 r0 bottom value=0.1uF
C66 "CAP0402 0.1uF 50V" CAP0402 466.19,850.11 r0 bottom value=0.1uF
C67 "CAP0402 0.1uF 50V" CAP0402 625.7,998.89 r270 bottom value=0.1uF
C68 "CAP0402 12pF 50V" CAP0402 327.28,770.88 r0 top value=12pF
C69 "CAP0402 0.1uF 50V" CAP0402 149.99,723.39 r0 top value=0.1uF
C70 "CL21A476MQYNNNE" CAP0805 136,674 r180 top
C71 "GRM155R71H104KE14D" CAP0402 789.23,407.48 r270 top
C72 "CC0402KRX5R8BB105" CAP0402 790.15,342.84 r90 top
C73 "GRM155R71H104KE14D" CAP0402 758.19,472.11 r0 top
C74 "GRM155R71H104KE14D" CAP0402 693.91,472.11 r0 top
C75 "GRM155R71H104KE14D" CAP0402 627.47,472.11 r0 top
C76 "CAP0402 0.1uF 50V" CAP0402 150.67,753.15 r0 top value=0.1uF
C77 "CAP0402 10uF 10V" CAP0402 567,1161.11 r90 top value=10uF
C78 "CAP0402 22uF 10V" CAP0402 677.28,1222 r180 bottom value=22uF
C79 "CAP0402 22uF 10V" CAP0402 751,1222 r0 bottom value=22uF
D1 "SML-310MTT86" "LED0603 GREEN" 379.5,60.55 r0 top
D2 "SML-310MTT86" "LED0603 GREEN" 250.64,1086.18 r180 top
D3 "SML-310MTT86" "LED0603 GREEN" 58.19,242.11 r270 top
D4 "SML-310MTT86" "LED0603 GREEN" 262.19,956.11 r90 top
FB1 "BLM15PX121SZ1D" FERRIT0402 412.19,591.11 r180 bottom
FB2 "BLM15PX121SZ1D" FERRIT0402 529,785.16 r0 bottom
FB3 "BLM15PX121SZ1D" FERRIT0402 430.5,137.55 r180 top
FB4 "BLM15PX121SZ1D" FERRIT0402 348.53,1068.26 r270 top
L1 "SRN3012BTA-100M" SRN3012BTA-100M 729.19,1284.11 r0 top
L2 "NR3015T2R2M" IND_NR3015T2R2M 715,1319 r270 bottom
P1 "XSLS00-52-B" XSXL52 1017.19,517.11 r90 top locked
P2 "XSLS00-40-A" XSXL40 1016.18,1105.05 r270 top
R1 "511K" RES0402 426.12,1239.95 r0 top
R2 "49.9R" RES0402 357.51,1340.11 r0 top
R3 "105K" RES0402 425.94,1270.66 r180 top
R4 "100K" RES0402 410.19,1322.11 r270 top
R5 "13.3K" RES0402 357.51,1303.11 r180 top
R6 "RES0402 10K" RES0402 689.5,79.24 r90 top value=10K
R7 "RES0402 100R" RES0402 394.5,100.55 r0 top value=100R
R8 "RES0402 100R" RES0402 298.9,1049.37 r0 top value=100R
R9 "RES0402 10K" RES0402 582.39,1109.4 r0 top value=10K
R10 "RES0402 4K7" RES0402 278.49,286.6 r0 top value=4K7
R11 "RES0402 0R" RES0402 871.51,423.11 r0 top value=0R
R12 "RES0402 0R" RES0402 872.19,453.11 r0 top value=0R
R13 "RES0402 0R" RES0402 872.19,483.11 r0 top value=0R
R14 "RES0402 0R" RES0402 872.58,603.11 r180 top value=0R
R15 "RES0402 0R" RES0402 872.58,634.12 r180 top value=0R
R16 "RES0402 0R" RES0402 872.58,663.84 r180 top value=0R
R17 "RES0402 1K" RES0402 78.19,306.11 r0 top value=1k
R18 "RES0402 0R" RES0402 872.19,513.11 r0 top value=0R
R19 "RES0402 0R" RES0402 872.19,543.11 r0 top value=0R
R20 "RES0402 0R" RES0402 872.51,573.11 r0 top value=0R
R21 "RES0402 4K7" RES0402 434.19,285.11 r180 top value=4K7
R22 "RES0402 4K7" RES0402 598.62,1028.23 r180 top value=4K7
R23 "RES0402 0R" RES0402 227.09,790.48 r90 top value=0R
R24 "RES0402 0R" RES0402 55.12,767.72 r270 top value=0R
R25 "RES0402 0R" RES0402 1066,1183 r90 bottom value=0R
R26 "RES0402 0R" RES0402 949,1183 r90 bottom value=0R
R27 "RES0402 0R" RES0402 620.09,628.8 r90 top value=0R
R28 "RES0402 0R" RES0402 471.81,630.01 r90 top value=0R
R29 "RES0402 1K" RES0402 320.51,943.11 r0 top value=1k
R30 "RES0402 0R" RES0402 569.39,630.46 r90 top value=0R
R31 "RES0402 33R" RES0402 834.2,1071.81 r180 top value=33R
R32 "RES0402 33R" RES0402 834.2,1019.45 r180 top value=33R
R33 "RES0402 4K7" RES0402 416.83,790.82 r0 top value=4K7
R34 "ERJ-2RKF4701X" RES0402 658.66,263.83 r90 top
R35 "ERJ-2RKF4701X" RES0402 688.57,263.67 r90 top
R36 "ERJ-2RKF4701X" RES0402 576.01,339.17 r0 top
R37 "ERJ-2RKF4701X" RES0402 576.01,370.16 r0 top
R38 "RES0402 100R" RES0402 189,618 r180 top value=100R
R39 "RES0402 10K" RES0402 425.32,751 r180 top value=10K
R40 "RES0402 10K" RES0402 425,721 r0 top value=10K
R41 "RES0402 0R" RES0402 873.46,1143.41 r0 top value=0R
R42 "RES0402 0R" RES0402 874.25,1111.48 r0 top value=0R
R43 "RES0402 33R" RES0402 844.41,265.48 r180 top value=33R
R44 "RES0402 33R" RES0402 843.78,296.48 r180 top value=33R
R45 "RES0402 10K" RES0402 420.32,1000 r180 top value=10K
R46 "RES0402 10K" RES0402 423.32,947 r0 top value=10K
R47 "RES0402 10K" RES0402 395,218.31 r270 top value=10K
R48 "RES0402 10K" RES0402 448,218.31 r90 top value=10K
R49 "RES0402 100K" RES0402 613,1423.69 r90 bottom value=100K
R50 "RES0402 13K3" RES0402 570,1423.69 r90 bottom value=13K3
R51 "RES0402 10K" RES0402 527,1423.69 r90 bottom value=10K
R52 "RES0402 0R" RES0402 993,1183 r90 bottom value=0R
R53 "RES0402 0R" RES0402 900,1183 r90 bottom value=0R
TP1 "Test Point" "Test Point" 918,505 r90 bottom
TP2 "Test Point" "Test Point" 917,571 r90 bottom
U1 "TPS54302DDCR" "SOT95P280X110-6N - duplicate1" 549.78,1282.51 r180 top
U2 "LD39200PU33R" LD39200PUR 586.5,67.55 r0 top
U3 "LD39200PU33R" LD39200PUR 472.19,1112.11 r0 top
U4 "STM32H747AII6" UFBGA169#1 269.36,455.57 r180 top
U5 "STM32H747AII6" UFBGA169#2 608.28,851.26 r0 top
U6 "ICM-42688-P" IMU42688 131.71,811.51 r0 top
U7 "TRSF3232EIRGTR" TRSF3232EIRGTR 693.94,374.72 r270 top
U8 "TPS62160DGKT" SOP65P490X110-8N 504,1321 r0 bottom
Y1 "ECS-240-12-37B-CKY-TR" XTAL_ECS-240-12-37B-CKY-TR 535.19,485.11 r270 top
Y2 "ECS-240-12-37B-CKY-TR" XTAL_ECS-240-12-37B-CKY-TR 325.28,832.88 r90 top

## Footprints (in the part's own frame and the unit in brackets; to place one, negate y for a bottom-side part, rotate by r counter-clockwise, add the part's x,y. Pads: shape width x height; smd on the part's side, far side on the other; paste and mask are expansions set on the pad)
CAP0402 [mm]
  rrect50% 0.6x0.6 smd mask+0.05: 1(0.45,0) 2(-0.45,0)
  silkscreen extent -0.04,-0.25 0.04,0.25, body extent -0.5,-0.25 0.5,0.25, height 0.55
CAP0603 [mm]
  rrect50% 0.9x1 smd mask+0.05: 1(-0.8,0) 2(0.8,0)
  silkscreen extent -0.1,-0.39 0.1,0.39, body extent -0.8,-0.4 0.8,0.4, height 0.8
CAP0603-M [mm]
  rrect50% 0.95x1 smd mask+0.05: 1(-0.8,0) 2(0.8,0)
  silkscreen extent -0.05,-0.39 0.05,0.39, body extent -0.8,-0.4 0.8,0.4, height 0.8
CAP0805 [mm]
  rrect50% 1.1x1.5 smd mask+0.05: 1(-0.9,0) 2(0.9,0)
  silkscreen extent -0.15,-0.62 0.15,0.61, body extent -1,-0.62 1,0.63, height 0.9
FERRIT0402 [mm]
  rrect50% 0.54x0.6 smd mask+0.05: 1(-0.432,0) 2(0.432,0)
  silkscreen extent -0.06,-0.24 0.06,0.24, body extent -0.5,-0.25 0.5,0.25, height 0.5
IMU42688 [mm]
  rrect50% 0.59x0.35 smd mask+0: 1(-1.038,1.029) 2(-1.038,0.529) 3(-1.038,0.029) 4(-1.038,-0.471) 8(1.292,-0.471) 9(1.292,0.029) 10(1.292,0.529) 11(1.292,1.029)
  rrect50% 0.35x0.59 smd mask+0: 5(-0.373,-0.636) 6(0.127,-0.636) 7(0.627,-0.636) 12(0.627,1.194) 13(0.127,1.194) 14(-0.373,1.194)
  silkscreen extent -1.97,-0.97 1.63,1.53, body extent -1.37,-0.97 1.63,1.53, height 0.97
IND_NR3015T2R2M [mm]
  rect 0.8x2.7 smd: 1(-1.1,0) 2(1.1,0)
  silkscreen extent -1.5,-1.7 1.5,1.7, body extent -1.5,-1.5 1.5,1.5, height 1.5
LD39200PUR [mm]
  rrect50% 0.84x0.4 smd: 1(-1.435,0.95) 2(-1.435,0) 3(-1.435,-0.95) 4(1.435,-0.95) 5(1.435,0) 6(1.435,0.95)
  rect 1.625x2.365 smd paste-2: 7(0,0)
  silkscreen extent -1.88,-1.5 1.5,1.78, body extent -1.5,-1.5 1.5,1.5, height 1
"LED0603 GREEN" [mm]
  rrect50% 0.8x0.82 smd mask+0.05: 1(0.8,0) 2(-0.8,0)
  silkscreen extent -0.24,-0.4 0.26,0.4, body extent -0.8,-0.4 0.8,0.4, height 0.7
RES0402 [mm]
  rrect50% 0.5x0.6 smd mask+0.05: 1(-0.5,0) 2(0.5,0)
  silkscreen extent -0.08,-0.24 0.08,0.24, body extent -0.5,-0.25 0.5,0.25, height 0.35
SOP65P490X110-8N [mm]
  rrect25% 1.47x0.48 smd paste+0 mask+0.102: 1(-2.15,0.975) 2(-2.15,0.325) 3(-2.15,-0.325) 4(-2.15,-0.975) 5(2.15,-0.975) 6(2.15,-0.325) 7(2.15,0.325) 8(2.15,0.975)
  silkscreen extent -3.62,-1.54 1.5,1.54, body extent -2.45,-1.5 2.45,1.5, height 1.1
"SOT95P280X110-6N - duplicate1" [mm]
  rrect25% 1.25x0.59 smd: 1(-1.255,0.95) 2(-1.255,0) 3(-1.255,-0.95) 4(1.255,-0.95) 5(1.255,0) 6(1.255,0.95)
  silkscreen extent -2.5,-1.57 0.8,1.57, body extent -1.4,-1.45 1.4,1.45, height 1.1
SRN3012BTA-100M [mm]
  rrect50% 1.3x3.5 smd mask+0.051: 1(-1.1,0) 2(1.1,0)
  silkscreen extent -0.2,-1.5 0.2,1.5, body extent -1.48,-1.48 1.48,1.47, height 1.11
"Test Point" [mm]
  round 1 smd paste-2539.97 mask+0.051: TP(0,0)
  body extent -0.41,-0.4 0.39,0.4, height 0.01
TRSF3232EIRGTR [mm]
  rrect50% 0.8x0.25 smd paste+0 mask+0.07: 1(-1.448,0.75) 2(-1.448,0.25) 3(-1.448,-0.25) 4(-1.448,-0.75) 9(1.448,-0.75) 10(1.448,-0.25) 11(1.448,0.25) 12(1.448,0.75)
  rrect50% 0.25x0.8 smd paste+0 mask+0.07: 5(-0.75,-1.448) 6(-0.25,-1.448) 7(0.25,-1.448) 8(0.75,-1.448) 13(0.75,1.448) 14(0.25,1.448) 15(-0.25,1.448) 16(-0.75,1.448)
  rect 1.68x1.68 smd paste+0 mask+0: 17(0,0)
  silkscreen extent -1.68,-1.68 1.68,1.68, body extent -1.55,-1.55 1.55,1.55, height 0.99
UFBGA169#1 [mil]
  round 10 smd paste+0 mask+0: A1(-118.11,118.11) A2(-98.43,118.11) A3(-78.74,118.11) A4(-59.06,118.11) A5(-39.37,118.11) A6(-19.69,118.11) A7(0,118.11) A8(19.68,118.11) A9(39.37,118.11) A10(59.06,118.11) A11(78.74,118.11) A12(98.43,118.11) A13(118.11,118.11) B1(-118.11,98.43) B2(-98.43,98.43) B3(-78.74,98.43) B4(-59.06,98.43) B5(-39.37,98.43) B6(-19.69,98.43) B7(0,98.43) B8(19.68,98.43) B9(39.37,98.43) B10(59.06,98.43) B11(78.74,98.43) B12(98.43,98.43) B13(118.11,98.43) C1(-118.11,78.74) C2(-98.43,78.74) C3(-78.74,78.74) C4(-59.06,78.74) C5(-39.37,78.74) C6(-19.69,78.74) C7(0,78.74) C8(19.68,78.74) C9(39.37,78.74) C10(59.06,78.74) C11(78.74,78.74) C12(98.43,78.74) C13(118.11,78.74) D1(-118.11,59.06) D2(-98.43,59.06) D3(-78.74,59.06) D4(-59.06,59.06) D5(-39.37,59.06) D6(-19.69,59.06) D7(0,59.06) D8(19.68,59.06) D9(39.37,59.06) D10(59.06,59.06) D11(78.74,59.06) D12(98.43,59.06) D13(118.11,59.06) E1(-118.11,39.37) E2(-98.43,39.37) E3(-78.74,39.37) E4(-59.06,39.37) E5(-39.37,39.37) E6(-19.69,39.37) E7(0,39.37) E8(19.68,39.37) E9(39.37,39.37) E10(59.06,39.37) E11(78.74,39.37) E12(98.43,39.37) E13(118.11,39.37) F1(-118.11,19.69) F2(-98.43,19.69) F3(-78.74,19.69) F4(-59.06,19.69) F5(-39.37,19.69) F6(-19.69,19.69) F7(0,19.69) F8(19.68,19.69) F9(39.37,19.69) F10(59.06,19.69) F11(78.74,19.69) F12(98.43,19.69) F13(118.11,19.69) G1(-116.41,-0.64) G2(-98.43,0) G3(-78.74,0) G4(-59.06,0) G5(-39.37,0) G6(-19.69,0) G7(0,0) G8(19.68,0) G9(39.37,0) G10(59.06,0) G11(78.74,0) G12(98.43,0) G13(118.11,0) H1(-118.11,-19.69) H2(-98.43,-19.69) H3(-78.74,-19.69) H4(-59.06,-19.69) H5(-39.37,-19.69) H6(-19.69,-19.69) H7(0,-19.69) H8(19.68,-19.69) H9(39.37,-19.69) H10(59.06,-19.69) H11(78.74,-19.69) H12(98.43,-19.69) H13(118.11,-19.69) J1(-118.11,-39.37) J2(-98.43,-39.37) J3(-78.74,-39.37) J4(-59.06,-39.37) J5(-39.37,-39.37) J6(-19.69,-39.37) J7(0,-39.37) J8(19.68,-39.37) J9(39.37,-39.37) J10(59.06,-39.37) J11(78.74,-39.37) J12(98.43,-39.37) J13(118.11,-39.37) K1(-118.11,-59.06) K2(-98.43,-59.06) K3(-78.74,-59.06) K4(-59.06,-59.06) K5(-39.37,-59.06) K6(-19.69,-59.06) K7(0,-59.06) K8(19.68,-59.06) K9(39.37,-59.06) K10(59.06,-59.06) K11(78.74,-59.06) K12(98.43,-59.06) K13(118.11,-59.06) L1(-118.11,-78.74) L2(-98.43,-78.74) L3(-78.74,-78.74) L4(-59.06,-78.74) L5(-39.37,-78.74) L6(-19.69,-78.74) L7(0,-78.74) L8(19.68,-78.74) L9(39.37,-78.74) L10(59.06,-78.74) L11(78.74,-78.74) L12(98.43,-78.74) L13(118.11,-78.74) M1(-118.11,-98.43) M2(-98.43,-98.43) M3(-78.74,-98.43) M4(-59.06,-98.43) M5(-39.37,-98.43) M6(-19.69,-98.43) M7(0,-98.43) M8(19.68,-98.43) M9(39.37,-98.43) M10(59.06,-98.43) M11(78.74,-98.43) M12(98.43,-98.43) M13(118.11,-98.43) N1(-118.11,-118.11) N2(-98.43,-118.11) N3(-78.74,-118.11) N4(-59.06,-118.11) N5(-39.37,-118.11) N6(-19.69,-118.11) N7(0,-118.11) N8(19.68,-118.11) N9(39.37,-118.11) N10(59.06,-118.11) N11(78.74,-118.11) N12(98.43,-118.11) N13(118.11,-118.11)
  silkscreen extent -166,-149 149,149, body extent -139,-139 139,139, height 24
UFBGA169#2 [mil]
  round 10 smd paste+0 mask+0: A1(-118.11,118.11) A2(-98.43,118.11) A3(-78.74,118.11) A4(-59.06,118.11) A5(-39.37,118.11) A6(-19.69,118.11) A7(0,118.11) A8(19.69,118.11) A9(39.37,118.11) A10(59.06,118.11) A11(78.74,118.11) A12(98.43,118.11) A13(118.11,118.11) B1(-118.11,98.43) B2(-98.43,98.43) B3(-78.74,98.43) B4(-59.06,98.43) B5(-39.37,98.43) B6(-19.69,98.43) B7(0,98.43) B8(19.69,98.43) B9(39.37,98.43) B10(59.06,98.43) B11(78.74,98.43) B12(98.43,98.43) B13(118.11,98.43) C1(-118.11,78.74) C2(-98.43,78.74) C3(-78.74,78.74) C4(-59.06,78.74) C5(-39.37,78.74) C6(-19.69,78.74) C7(0,78.74) C8(19.69,78.74) C9(39.37,78.74) C10(59.06,78.74) C11(78.74,78.74) C12(98.43,78.74) C13(118.11,78.74) D1(-118.11,59.06) D2(-98.43,59.06) D3(-78.74,59.06) D4(-59.06,59.06) D5(-39.37,59.06) D6(-19.69,59.06) D7(0,59.06) D8(19.69,59.06) D9(39.37,59.06) D10(59.06,59.06) D11(78.74,59.06) D12(98.43,59.06) D13(118.11,59.06) E1(-118.11,39.37) E2(-98.43,39.37) E3(-78.74,39.37) E4(-59.06,39.37) E5(-39.37,39.37) E6(-19.69,39.37) E7(0,39.37) E8(19.69,39.37) E9(39.37,39.37) E10(59.06,39.37) E11(78.74,39.37) E12(98.43,39.37) E13(118.11,39.37) F1(-118.11,19.69) F2(-98.43,19.69) F3(-78.74,19.69) F4(-59.06,19.69) F5(-39.37,19.69) F6(-19.69,19.69) F7(0,19.69) F8(19.69,19.69) F9(39.37,19.69) F10(59.06,19.69) F11(78.74,19.69) F12(98.43,19.69) F13(118.11,19.69) G1(-118.11,0) G2(-98.43,0) G3(-78.74,0) G4(-59.06,0) G5(-39.37,0) G6(-19.69,0) G7(0,0) G8(19.69,0) G9(39.37,0) G10(59.06,0) G11(78.74,0) G12(98.43,0) G13(118.11,0) H1(-118.11,-19.68) H2(-98.43,-19.68) H3(-78.74,-19.68) H4(-59.06,-19.68) H5(-39.37,-19.68) H6(-19.69,-19.68) H7(0,-19.68) H8(19.69,-19.68) H9(39.37,-19.68) H10(59.06,-19.68) H11(78.74,-19.68) H12(98.43,-19.68) H13(118.11,-19.68) J1(-118.11,-39.37) J2(-98.43,-39.37) J3(-78.74,-39.37) J4(-59.06,-39.37) J5(-39.37,-39.37) J6(-19.69,-39.37) J7(0,-39.37) J8(19.69,-39.37) J9(39.37,-39.37) J10(59.06,-39.37) J11(78.74,-39.37) J12(98.43,-39.37) J13(118.11,-39.37) K1(-118.11,-59.06) K2(-98.43,-59.06) K3(-78.74,-59.06) K4(-59.06,-59.06) K5(-39.37,-59.06) K6(-19.69,-59.06) K7(0,-59.06) K8(19.69,-59.06) K9(39.37,-59.06) K10(59.06,-59.06) K11(78.74,-59.06) K12(98.43,-59.06) K13(118.11,-59.06) L1(-118.11,-78.74) L2(-98.43,-78.74) L3(-78.74,-78.74) L4(-59.06,-78.74) L5(-39.37,-78.74) L6(-19.69,-78.74) L7(0,-78.74) L8(19.69,-78.74) L9(39.37,-78.74) L10(59.06,-78.74) L11(78.74,-78.74) L12(98.43,-78.74) L13(118.11,-78.74) M1(-118.11,-98.43) M2(-98.43,-98.43) M3(-78.74,-98.43) M4(-59.06,-98.43) M5(-39.37,-98.43) M6(-19.69,-98.43) M7(0,-98.43) M8(19.69,-98.43) M9(39.37,-98.43) M10(59.06,-98.43) M11(78.74,-98.43) M12(98.43,-98.43) M13(118.11,-98.43) N1(-118.11,-118.11) N2(-98.43,-118.11) N3(-78.74,-118.11) N4(-59.06,-118.11) N5(-39.37,-118.11) N6(-19.69,-118.11) N7(0,-118.11) N8(19.69,-118.11) N9(39.37,-118.11) N10(59.06,-118.11) N11(78.74,-118.11) N12(98.43,-118.11) N13(118.11,-118.11)
  silkscreen extent -166,-149 149,149, body extent -139,-139 139,139, height 24
XSXL40 [mm]
  rect 0.7x0.66 smd: 0(-5.786,-1.526) 0(-5.765,1.367) 0(5.653,-1.526) 0(5.67,1.37)
  rect 0.3x0.86 smd: 1(4.828,1.266) 2(4.578,-1.424) 3(4.328,1.266) 4(4.078,-1.424) 5(3.828,1.266) 6(3.578,-1.424) 7(3.328,1.266) 8(3.078,-1.424) 9(2.828,1.266) 10(2.578,-1.424) 11(2.328,1.266) 12(2.078,-1.424) 13(1.828,1.266) 14(1.578,-1.424) 15(1.328,1.266) 16(1.078,-1.424) 17(0.828,1.266) 18(0.578,-1.424) 19(0.328,1.266) 20(0.078,-1.424) 21(-0.172,1.266) 22(-0.422,-1.424) 23(-0.672,1.266) 24(-0.922,-1.424) 25(-1.172,1.266) 26(-1.422,-1.424) 27(-1.672,1.266) 28(-1.922,-1.424) 29(-2.172,1.266) 30(-2.422,-1.424) 31(-2.672,1.266) 32(-2.922,-1.424) 33(-3.172,1.266) 34(-3.422,-1.424) 35(-3.672,1.266) 36(-3.922,-1.424) 37(-4.172,1.266) 38(-4.422,-1.424) 39(-4.672,1.266) 40(-4.922,-1.424)
  silkscreen extent 5.49,2.16 5.74,2.41, body extent -6.62,-1.63 6.53,1.42, height 0.8
XSXL52 [mm]
  rect 0.7x0.66 smd: 0(-7.222,-1.346) 0(-7.205,1.549) 0(7.234,-1.344) 0(7.234,1.549)
  rect 0.3x0.86 smd: 1(-6.38,-1.242) 2(-6.13,1.448) 3(-5.88,-1.242) 4(-5.63,1.448) 5(-5.38,-1.242) 6(-5.13,1.448) 7(-4.88,-1.242) 8(-4.63,1.448) 9(-4.38,-1.242) 10(-4.13,1.448) 11(-3.88,-1.242) 12(-3.63,1.448) 13(-3.38,-1.242) 14(-3.13,1.448) 15(-2.88,-1.242) 16(-2.63,1.448) 17(-2.38,-1.242) 18(-2.13,1.448) 19(-1.88,-1.242) 20(-1.63,1.448) 21(-1.38,-1.242) 22(-1.13,1.448) 23(-0.88,-1.242) 24(-0.63,1.448) 25(-0.38,-1.242) 26(-0.13,1.448) 27(0.12,-1.242) 28(0.37,1.448) 29(0.62,-1.242) 30(0.87,1.448) 31(1.12,-1.242) 32(1.37,1.448) 33(1.62,-1.242) 34(1.87,1.448) 35(2.12,-1.242) 36(2.37,1.448) 37(2.62,-1.242) 38(2.87,1.448) 39(3.12,-1.242) 40(3.37,1.448) 41(3.621,-1.242) 42(3.871,1.448) 43(4.121,-1.242) 44(4.371,1.448) 45(4.621,-1.242) 46(4.871,1.448) 47(5.121,-1.242) 48(5.371,1.448) 49(5.621,-1.242) 50(5.871,1.448) 51(6.121,-1.242) 52(6.371,1.448)
  silkscreen extent -8.12,-1.85 -7.87,-1.6, body extent -8.08,-1.37 8.07,1.68, height 0.85
XTAL_ECS-240-12-37B-CKY-TR [mm]
  rrect50% 0.85x0.75 smd mask+0.051: 1(-0.675,-0.525) 2(0.675,-0.525) 3(0.675,0.525) 4(-0.675,0.525)
  silkscreen extent -1.45,-1.19 -1.31,-1.04, body extent -1,-0.8 1,0.8, height 0.5

## Part data
C1 C3 C8 C9 C12 C13: library part CMP-00265-1, "CAP CER 0.1UF 50V X5R 0402", Capacitance=100nF, Case/Package=0402, Dielectric=X5R, Manufacturer=Yageo, Max Operating Temperature=85°C, Min Operating Temperature=-55°C, Tolerance=10%, Voltage Rating=50V, Halogen Free="Halogen Free", Lead Free="Lead Free", Length=0.039inch, Manufacturer 1=Yageo, Manufacturer Part Number=CC0402KRX5R9BB104, Manufacturer Part Number 1=CC0402KRX5R9BB104, Mount="Surface Mount", Packaging="Tape and Reel", Thickness=0.022inch, Voltage Rating (DC)=50V, Width=0.02inch
C2 C7 C10 C11 C14: library part CMP-01031-1, "CAP CER 10UF 35V X5R 0603", Capacitance=10uF, Case Code (Imperial)=0603, Case Code (Metric)=1608, Dielectric=X5R, Manufacturer 1="Murata Electronics", Max Operating Temperature=85°C, Min Operating Temperature=-55°C, Package Quantity=1, Tolerance=20%, Voltage=35V, Case/Package=0603, Composition=Ceramic, Depth=0.8mm, Height=0.8mm, Lead Free="Lead Free", Length=1.6mm, Manufacturer Part Number 1=GRM188R6YA106MA73D, Mount="Surface Mount", Number of Pins=2, Packaging="Tape and Reel", REACH SVHC="No SVHC", Termination=SMD/SMT, Thickness=0.031inch, Voltage Rating=35V, Voltage Rating (DC)=35V, Weight=0.000222oz, Width=0.031inch
C4 C5: library part CMP-00520-1, "CAP CER 22UF 10V X5R 0402", Capacitance=22uF, Case Code (Imperial)=0402, Case Code (Metric)=1005, Dielectric=X5R, Manufacturer 1="TDK Corporation", Max Operating Temperature=85°C, Min Operating Temperature=-55°C, Tolerance=10%, Voltage=10V, Case/Package=0402, Depth=0.5mm, Length=1mm, Manufacturer Part Number 1=GRM158R61A226ME15D, Packaging="Tape and Reel", Radiation Hardening=No, REACH SVHC="No SVHC", Termination=SMD/SMT, Voltage Rating=10V
C6: library part CAP_Dup1_16, "CAP CER 75PF 25V C0G/NP0 0402", Dielectric Type=Capacitors, Manufacturer=YAGEO, Manufacturer PN=CC0402JRNPO9BN750, Package Size="0402 (1005 Metric)", Rated Voltage=25V, Temperature Coefficient="C0G, NP0", Tolerance=5%, CLASS=DISCRETE, PART_NUMBER=TMP-416
C15 C20 C23 C25 C28 C30 C31 C32 C33 C34 C35 C36 C37 C38 C40 C42 C47 C50 C52 C56 C58 C59 C60 C61 C62 C63 C64 C65 C66 C67 C69 C76: "Cap 0.1uF 50V 0402", Package=0402, Tolerance=10%, Voltage=50V, MP=CC0402KRX5R9BB104
C16 C17 C18 C19 C43 C44 C45 C46: "Cap 2.2uF 16V 0402", Package=0402, Voltage=16V, MP=C1005X5R1C225K050BC
C21 C29 C48 C57: "Cap 4.7uF 25V 0402", Package=0402, Tolerance=20%, Voltage=25V, MP=GRM155C61E475ME15J
C22 C26 C39 C49 C53 C55: "Cap 1uF 50V 0402", Package=0402, Voltage - Rate=50V, MP=GRM155R61H105KE05D
C24 C51: "Cap 0.1uF 50V 0402", Package=0402, Voltage=50V, MP=CC0402KRX5R9BB104
C27 C41 C54 C68: "Cap 12pF 50V 0402"
C70: library part 885012107014, "CAP CER 47UF 6.3V X5R 0805", Capacitance=47uF, Case Code (Imperial)=0805, Case Code (Metric)=2012, Dielectric=X5R, Max Operating Temperature=85°C, Min Operating Temperature=-55°C, Tolerance=20%, Voltage Rating=6.3V, Case/Package=0805, Category="Ceramic Capacitors", ComponentLink1Description=http://www.farnell.com/datasheets/1958454.pdf?src-supplier=Farnell, ComponentLink1URL=http://www.farnell.com/datasheets/1958454.pdf?src-supplier=Farnell, ComponentLink2Description=http://www.farnell.com/datasheets/1958454.pdf?src-supplier=Element14, ComponentLink2URL=http://www.farnell.com/datasheets/1958454.pdf?src-supplier=Element14, ComponentLink3Description=https://katalog.we-online.de/pbs/datasheet/885012107014.pdf?src-supplier=Digi-Key, ComponentLink3URL=https://katalog.we-online.de/pbs/datasheet/885012107014.pdf?src-supplier=Digi-Key, ComponentLink4Description=http://www.farnell.com/datasheets/1958454.pdf?src-supplier=Newark, ComponentLink4URL=http://www.farnell.com/datasheets/1958454.pdf?src-supplier=Newark, Length=0.079inch, Manufacturer Part Number=CL21A476MQYNNNE, Mount="Surface Mount", Packaging="Cut Tape", Pricing 1="1=0.37000, 5=0.35200, 10=0.33000, 25=0.31900, 50=0.30900, 100=0.29800 (USD)", RoHS=Yes, RoHS Compliant=Yes, Series=WCAP-CSGP, Stock 1=3580, Supplier 1=Newark, Thickness=0.057inch, Voltage Rating (DC)=6.3V, Width=0.049inch
C71 C73 C74 C75: library part CMP-01036-1, "CAP CER 0.1UF 50V X7R 0402", Capacitance=100nF, Case Code (Imperial)=0402, Case Code (Metric)=1005, Dielectric=X7R, Dielectric Material=Ceramic, Manufacturer 1="Murata Electronics", Max Operating Temperature=125°C, Min Operating Temperature=-55°C, Package Quantity=10000, Tolerance=10%, Voltage=50V, Case/Package=0402, Composition=Ceramic, Depth=0.5mm, Dissipation Factor=0.025%, Height=0.5mm, Lead Free="Lead Free", Length=1mm, Manufacturer Part Number 1=GRM155R71H104KE14D, Material=Ceramic, Mount="Surface Mount", Packaging="Tape and Reel", REACH SVHC="No SVHC", Termination=SMD/SMT, Thickness=0.022inch, Voltage Rating=50V, Voltage Rating (DC)=50V, Weight=0.000212oz, Width=0.5mm
C72: library part CMP-00520-1, "CAP CER 1UF 25V X5R 0402", Capacitance=1uF, Case Code (Imperial)=0402, Case Code (Metric)=1005, Dielectric=X5R, Manufacturer 1="TDK Corporation", Max Operating Temperature=85°C, Min Operating Temperature=-55°C, Tolerance=10%, Voltage=25V, Case/Package=0402, Depth=0.5mm, Length=1mm, Manufacturer Part Number 1=CC0402KRX5R8BB105, Packaging="Tape and Reel", Radiation Hardening=No, REACH SVHC="No SVHC", Termination=SMD/SMT, Voltage Rating=25V
C77: "Cap 10uF 10V 0402", Package=0402, Voltage=10V, MP=GRT155R61A106ME13D
C78 C79: "Cap 22uF 10V 0402", Package=0402, Voltage=10V, MP=GRM158R61A226ME15D
D1 D2 D3 D4: library part CMP-01130-2, "LED GREEN CLEAR 0603 SMD", Case Code (Imperial)=0603, Case Code (Metric)=1608, Color=Green,Yellow, Forward Current=20mA, Forward Voltage=2.2V, Illumination Color=Green, Lens Color=Colorless,Clear, Manufacturer 1="Rohm Semiconductor", Max Operating Temperature=85°C, Min Operating Temperature=-30°C, Package Quantity=3000, Case/Package=0603, Dominant Wavelength=570nm, Height=0.9mm, Lead Free="Lead Free", Length=1.6mm, Lens Style=Rectangular,Clear,Diffused,Colorless, Lens Transparency=Clear, Luminous Intensity=16mcd, Manufacturer Part Number 1=SML-310MTT86, Mount="Surface Mount", Number of LEDs=1, Number of Pins=2, Packaging="Tape and Reel", Radiation Hardening=No, Test Current=20mA, Viewing Angle=140°, Wavelength=570nm, Width=0.8mm
FB1 FB2 FB3 FB4: "120 Ohms @ 100 MHz 1 Power Line Ferrite Bead 0402 (1005 Metric) 2A 55mOhm", Current Rating (Max)=2A, DC Resistance (DCR) (Max)=55mOhm, Impedance @ Frequency="120 Ohms @ 100 MHz", MP=BLM15PX121SZ1D
L1: library part SRN3012BTA-330M, "10uH", Manufacturer_Name=Bourns, Datasheet Link=https://www.bourns.com/docs/Product-Datasheets/SRN3012BTA.pdf, Geometry.Height=1.2mm, Manufacturer_Part_Number=SRN3012BTA-100M, Mouser Part Number=SRN3012BTA-100M, Mouser Price/Stock=https://www.mouser.co.uk/ProductDetail/Bourns/SRN3012BTA-330M?qs=Imq1NPwxi74rPoSZ4PPaRw%3D%3D
L2: "2.2 ÂµH Shielded Drum Core, Wirewound Inductor 1.5 A 72mOhm Max Nonstandard", Package="Nonstandard Taiyo Yuden", Availability="In Stock", Check_prices=https://www.snapeda.com/parts/NR3015T2R2M/Taiyo+Yuden/view-part/?ref=eda, MF="Taiyo Yuden", MP=NR3015T2R2M, Price=None, Purchase-URL=https://pricing.snapeda.com/search/part/NR3015T2R2M/?ref=eda, SnapEDA_Link=https://www.snapeda.com/parts/NR3015T2R2M/Taiyo+Yuden/view-part/?ref=snap
R1: library part CMP-00299-1_1, "RES SMD 511K OHM 1% 1/16W 0402", Case Code (Imperial)=0402, Case Code (Metric)=1005, Manufacturer=Yageo, Manufacturer Part Number=RC0402FR-07511KL, Max Operating Temperature=155°C, Max Power Dissipation=63mW, Min Operating Temperature=-55°C, Package Quantity=1, Power Rating=62.5mW, Temperature Coefficient=100ppm/°C, Tolerance=1%, Voltage Rating=50V, Case/Package=0402, Composition="Thick Film", Depth=0.5mm, Features="Moisture Resistant", Height=0.016inch, Lead Free="Lead Free", Length=1mm, Manufacturer 1=Yageo, Manufacturer Part Number 1=RC0402FR-07511KL, Military Standard=Not, Number of Terminations=2, Packaging="Tape and Reel", Resistance=511K, Termination=SMD/SMT, Voltage Rating (DC)=50V, Width=0.02inch, Working Voltage=50V
R2: library part CMP-00299-1_1, "RES SMD 49.9R OHM 1% 1/16W 0402", Case Code (Imperial)=0402, Case Code (Metric)=1005, Manufacturer=Yageo, Manufacturer Part Number=RC0402FR-0749R9L, Max Operating Temperature=155°C, Max Power Dissipation=63mW, Min Operating Temperature=-55°C, Package Quantity=1, Power Rating=62.5mW, Temperature Coefficient=100ppm/°C, Tolerance=1%, Voltage Rating=50V, Case/Package=0402, Composition="Thick Film", Depth=0.5mm, Features="Moisture Resistant", Height=0.016inch, Lead Free="Lead Free", Length=1mm, Manufacturer 1=Yageo, Manufacturer Part Number 1=RC0402FR-0749R9L, Military Standard=Not, Number of Terminations=2, Packaging="Tape and Reel", Resistance=49.9R, Termination=SMD/SMT, Voltage Rating (DC)=50V, Width=0.02inch, Working Voltage=50V
R3: library part CMP-00299-1_1, "RES SMD 105K OHM 1% 1/16W 0402", Case Code (Imperial)=0402, Case Code (Metric)=1005, Manufacturer=Yageo, Manufacturer Part Number=RC0402FR-07105KL, Max Operating Temperature=155°C, Max Power Dissipation=63mW, Min Operating Temperature=-55°C, Package Quantity=1, Power Rating=62.5mW, Temperature Coefficient=100ppm/°C, Tolerance=1%, Voltage Rating=50V, Case/Package=0402, Composition="Thick Film", Depth=0.5mm, Features="Moisture Resistant", Height=0.016inch, Lead Free="Lead Free", Length=1mm, Manufacturer 1=Yageo, Manufacturer Part Number 1=RC0402FR-07105KL, Military Standard=Not, Number of Terminations=2, Packaging="Tape and Reel", Resistance=105K, Termination=SMD/SMT, Voltage Rating (DC)=50V, Width=0.02inch, Working Voltage=50V
R4: library part CMP-00299-1_1, "RES SMD 100K OHM 1% 1/16W 0402", Case Code (Imperial)=0402, Case Code (Metric)=1005, Manufacturer=Yageo, Manufacturer Part Number=RC0402FR-07100KL, Max Operating Temperature=155°C, Max Power Dissipation=63mW, Min Operating Temperature=-55°C, Package Quantity=1, Power Rating=62.5mW, Temperature Coefficient=100ppm/°C, Tolerance=1%, Voltage Rating=50V, Case/Package=0402, Composition="Thick Film", Depth=0.5mm, Features="Moisture Resistant", Height=0.016inch, Lead Free="Lead Free", Length=1mm, Manufacturer 1=Yageo, Manufacturer Part Number 1=RC0402FR-07100KL, Military Standard=Not, Number of Terminations=2, Packaging="Tape and Reel", Resistance=100K, Termination=SMD/SMT, Voltage Rating (DC)=50V, Width=0.02inch, Working Voltage=50V
R5: library part CMP-00299-1_1, "RES SMD 13.3K OHM 1% 1/16W 0402", Case Code (Imperial)=0402, Case Code (Metric)=1005, Manufacturer=Yageo, Manufacturer Part Number=RC0402FR-0713K3L, Max Operating Temperature=155°C, Max Power Dissipation=63mW, Min Operating Temperature=-55°C, Package Quantity=1, Power Rating=62.5mW, Temperature Coefficient=100ppm/°C, Tolerance=1%, Voltage Rating=50V, Case/Package=0402, Composition="Thick Film", Depth=0.5mm, Features="Moisture Resistant", Height=0.016inch, Lead Free="Lead Free", Length=1mm, Manufacturer 1=Yageo, Manufacturer Part Number 1=RC0402FR-0713K3L, Military Standard=Not, Number of Terminations=2, Packaging="Tape and Reel", Resistance=13.3K, Termination=SMD/SMT, Voltage Rating (DC)=50V, Width=0.02inch, Working Voltage=50V
R6 R9 R51: "RES 10K 0402", MP=RC0402FR-0710KL
R7 R8 R38: "RES 100R 0402", MP=RC0402FR-07100RL
R10 R21 R22 R33: "RES 4K7 0402", MP=RC0402JR-074K7L
R11 R12 R13 R14 R15 R16 R18 R19 R20 R23 R24 R25 R26 R27 R28 R30 R41 R42 R52 R53: "RES 0R 0402", Package=0402, Power Rating=63mW, Tolerance=5%, MP=RC0402JR-070RL
R17 R29: "RES 1K 0402", Package=0402, Power Rating=63mW, Tolerance=1%, MP=RC0402FR-071KL
R31 R32 R43 R44: "RES 33R 0402", MP=RC0402FR-0733RL
R34 R35 R36 R37: library part CMP-00607-1, "RES SMD 4.7K OHM 1% 1/10W 0402", Case Code (Imperial)=0402, Case Code (Metric)=1005, Manufacturer 1="Panasonic Electronic Components", Max Operating Temperature=155°C, Max Power Dissipation=100mW, Min Operating Temperature=-55°C, Package Quantity=1, Resistance=0R, Temperature Coefficient=100ppm/°C, Tolerance=1%, Voltage Rating=50V, Case/Package=0402, Composition="Thick Film", Contact Plating=Tin, Depth=0.5mm, Features="Automotive AEC-Q200", Height=0.35mm, Lead Free="Lead Free", Length=1mm, Manufacturer Part Number 1=ERJ-2RKF4701X, Military Standard=Not, Mount="Surface Mount", Number of Pins=2, Number of Terminations=2, Packaging="Tape and Reel", Power Rating=100mW, Radiation Hardening=No, REACH SVHC="No SVHC", Termination=SMD/SMT, Voltage Rating (DC)=50V, Width=0.02inch
R39 R40 R45 R46 R47 R48: "RES 10K 0402", Package=0402, Power Rating=63mW, Tolerance=1%, MP=RC0402FR-0710KL
R49: "RES 100K 0402", MP=RC0402FR-07100KL
R50: "RES 13K3 0402", MP=RC0402FR-0713K3L
U1: "4.5-V to 28-V Input, 3-A Output, EMI Friendly Synchronous Step-Down Converter", Package="SOT-23-THN-6 Texas Instruments", Availability="In Stock", Check_prices=https://www.snapeda.com/parts/TPS54302DDCR/Texas+Instruments/view-part/?ref=eda, MF="Texas Instruments", MP=TPS54302DDCR, Price=None, Purchase-URL=https://pricing.snapeda.com/search?q=TPS54302DDCR&ref=eda, SnapEDA_Link=https://www.snapeda.com/parts/TPS54302DDCR/Texas+Instruments/view-part/?ref=snap
U2 U3: library part LD39200PUR, "LDO IC 1 Output 2A 6-DFN _3x3_", Package="DFN-6 STMicroelectronics", Availability=Unavailable, MF=STMicroelectronics, MP=LD39200PU33R, Price=None, SnapEDA_Link=https://www.snapeda.com/parts/LD39200PUR/STMicroelectronics/view-part/882017/?ref=snap
U4 U5: "High-performance and DSP with DP-FPU, Arm Cortex-M7 + Cortex-M4 MCU with 2MBytes of Flash memory, 1MB RAM, 480 MHz CPU, Art Accelerator, L1 cache, external memory interface, large set of peripherals, SMPS, MIPI-DSI", Manufacturer_Name=STMicroelectronics, Copyright="Copyright (C) 2026 Ultra Librarian. All rights reserved.", Manufacturer_Part_Number=STM32H747AII6, RefDes=RefDes, Type=Type
U6: "Accelerometer, Gyroscope, 6 Axis Sensor Output", Package=None, Availability=Unavailable, MP=ICM-42688-P, Price=None
U7: "No Description Available", Mfr_Name="Texas Instruments", RefDes=RefDes, Type=Type
U8: "3V-17V 1A Step-Down Converters with DCS-Controlâ„¢", Package="VSSOP-8 Texas Instruments", Check_prices=https://www.snapeda.com/parts/TPS62160DGKT/Texas+Instruments/view-part/?ref=eda, MF="Texas Instruments", MP=TPS62160DGKT, SnapEDA_Link=https://www.snapeda.com/parts/TPS62160DGKT/Texas+Instruments/view-part/?ref=snap
Y1 Y2: "Crystal 24 MHz ±10ppm 12pF 50 Ohms 4-SMD, No Lead", ESR (Equivalent Series Resistance)="50 Ohms", Frequency="24 MHz", Frequency Stability=±10ppm, Load Capacitance=12pF, Operating Temperature="-30°C ~ 85°C", Frequency Tolerance=±10ppm, MP=ECS-240-12-37B-CKY-TR, Size / Dimension="2.00mm x 1.60mm"
P2: Manufacturer Part Number 1=XSLS00-40-A

## Free pads (board coordinates)
  round 165.35 / inner round 0 / far side round 149.61 hole 86.61: 0(243.59,1416.82) 0(244.09,157.48) 0(873.52,156.98) 0(873.52,1416.82)
  rrect50% 150x100 smd: 2(104,1110) 2(104,1272)
  rrect50% 100x150 smd: 2(422,1487.48) 2(660.6,1487.48)

## Via types
v1: diameter 20, hole 10, Top Layer - Signal to Bottom Layer - Signal, tented both sides, 285 vias
v2: diameter 10, hole 5.91, Top Layer - Signal to Bottom Layer - Signal, tented both sides, 145 vias
v3: diameter 19.68, hole 7.87, Top Layer - Signal to Bottom Layer - Signal, tented both sides, 1 vias